# Altium PCB PCB_Control.V03.R00.PcbDoc (part 1 of 7)
Units mm, origin at the board's own origin, x right, y up, seen from the top; angles counter-clockwise.
Board outline 188 x 90 mm, 6 copper layers (Top Layer, GND 1, PWR, Signal L4, GND 2, Bottom Layer), stack 1.548 mm thick; 541 components, 265 nets, 1491 pads, 2159 vias.
Unrouted connection lines stored in the file: 819.
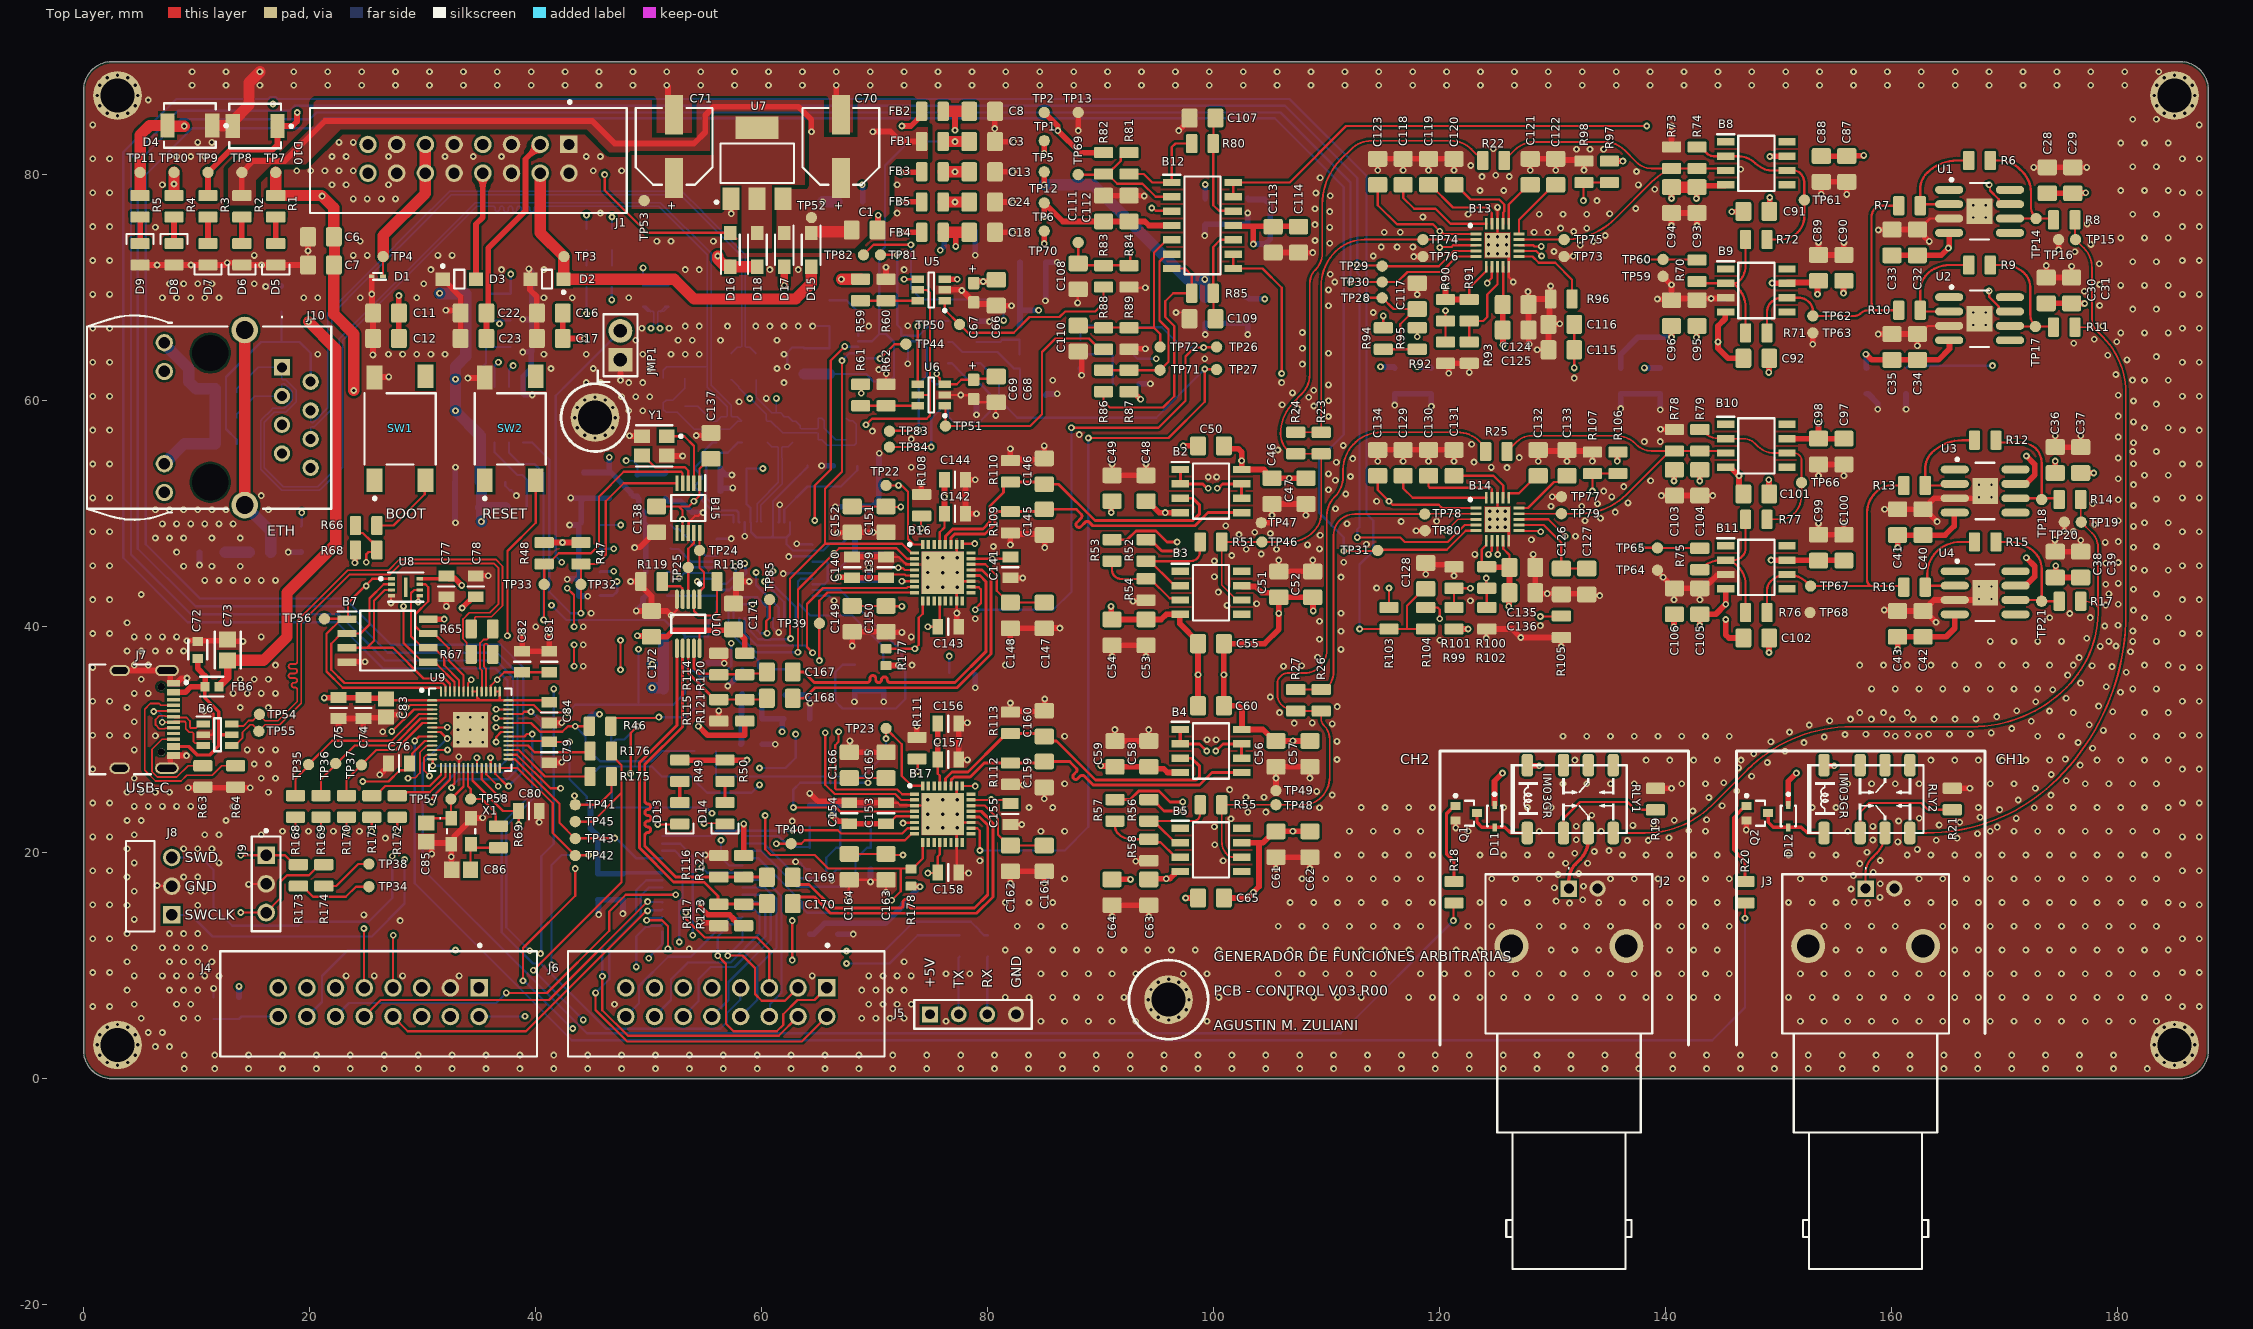
[diagram p0: Top Layer view]
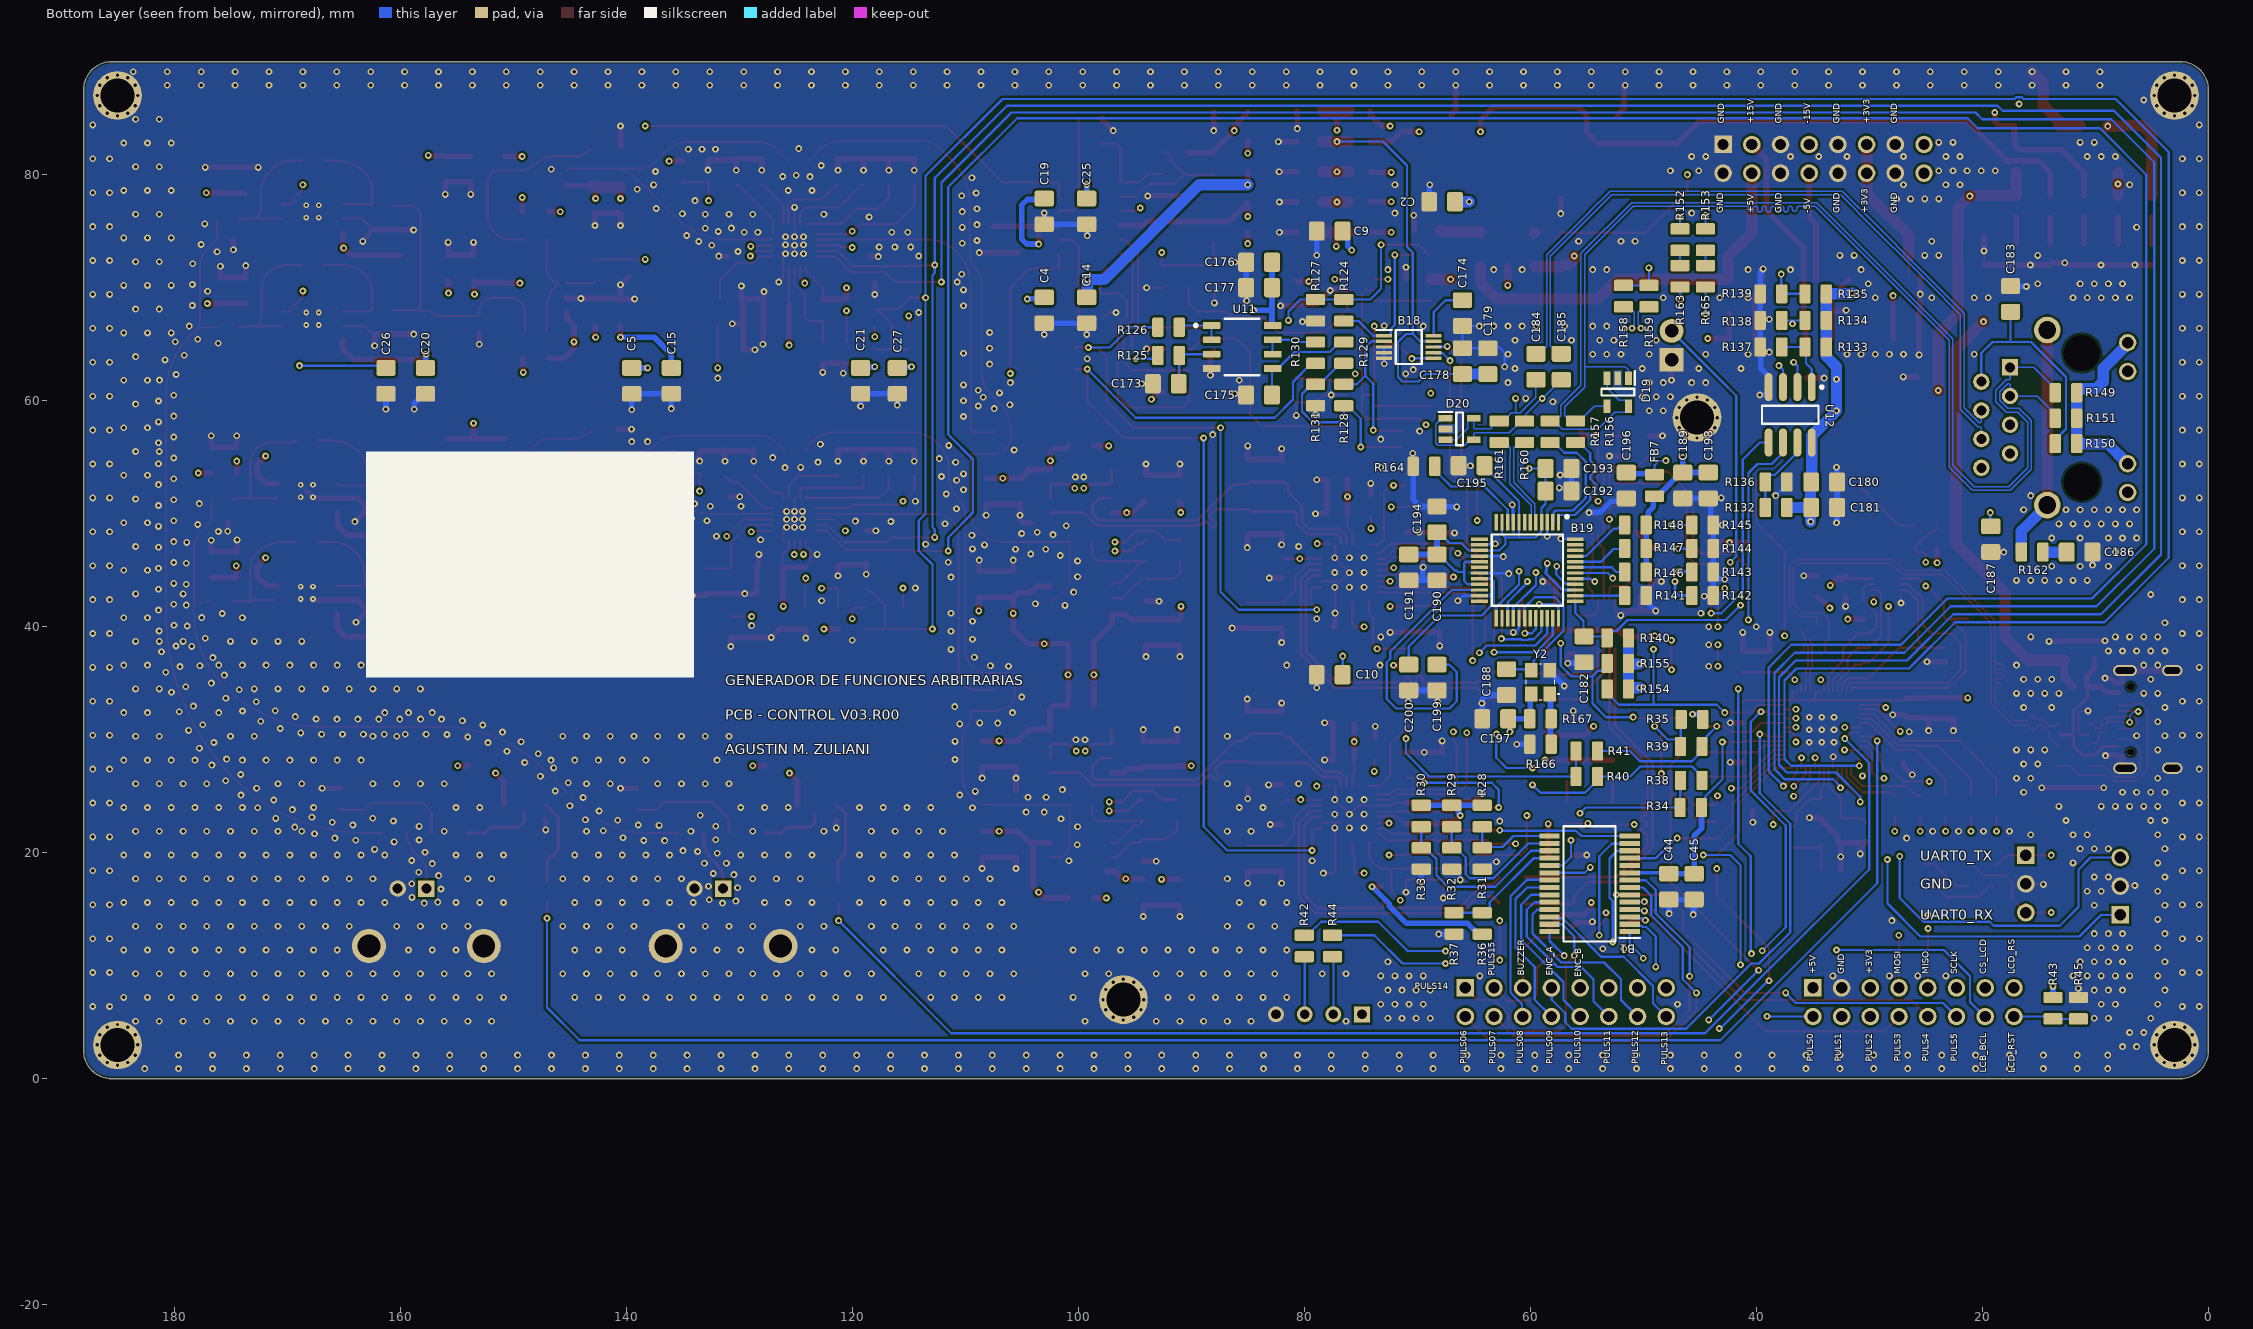
[diagram p1: Bottom Layer view, seen from below]
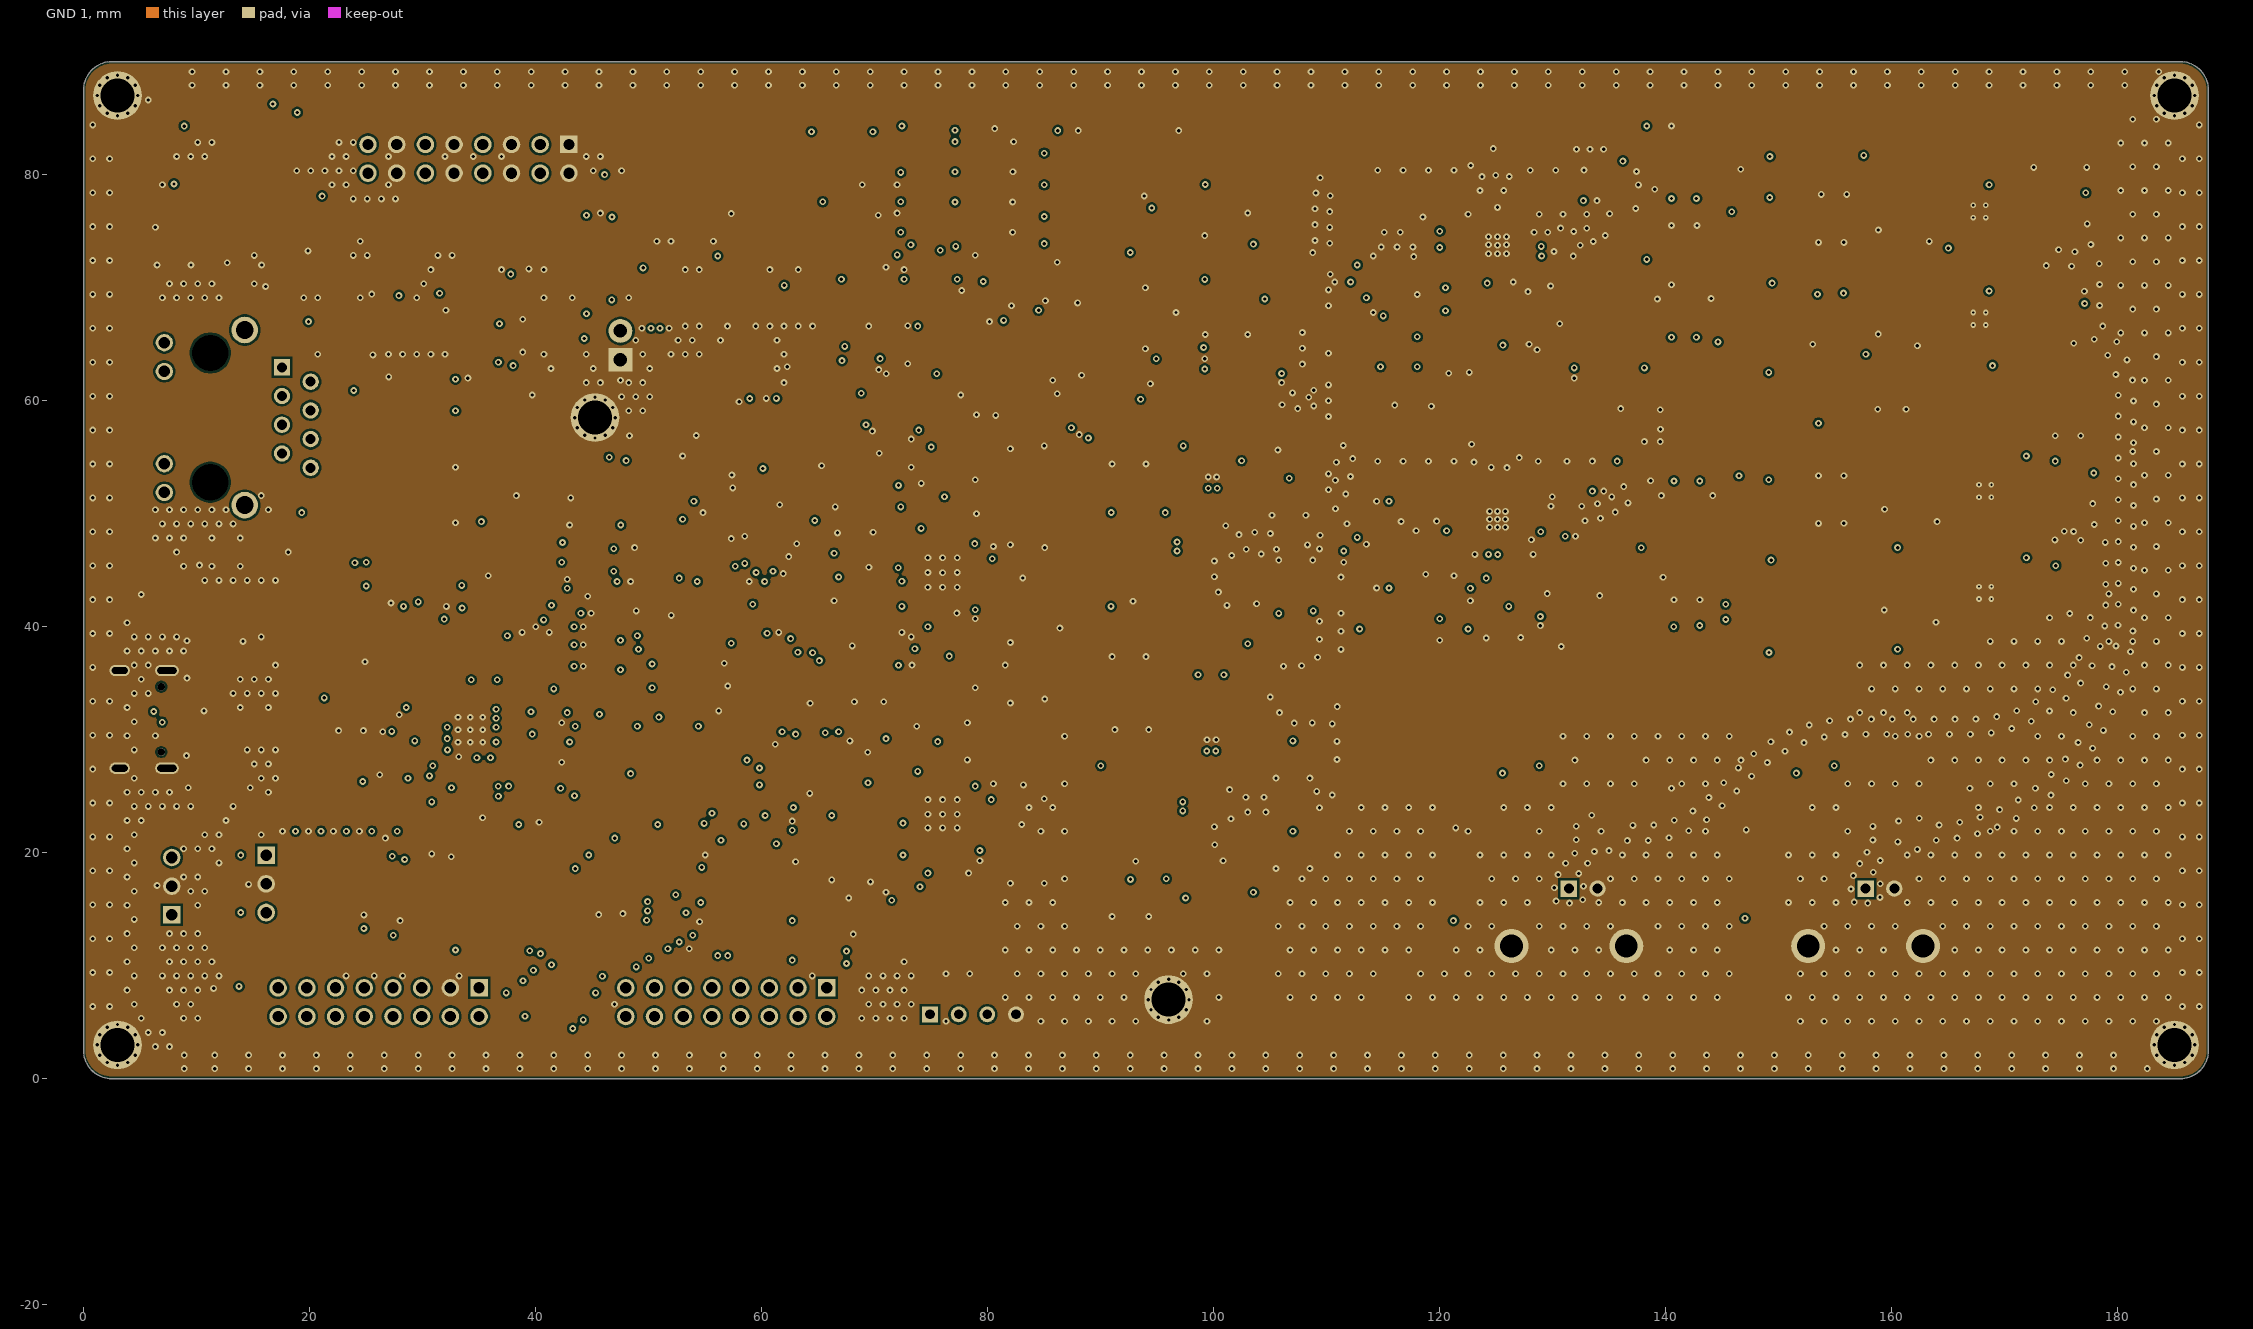
[diagram p2: GND 1]
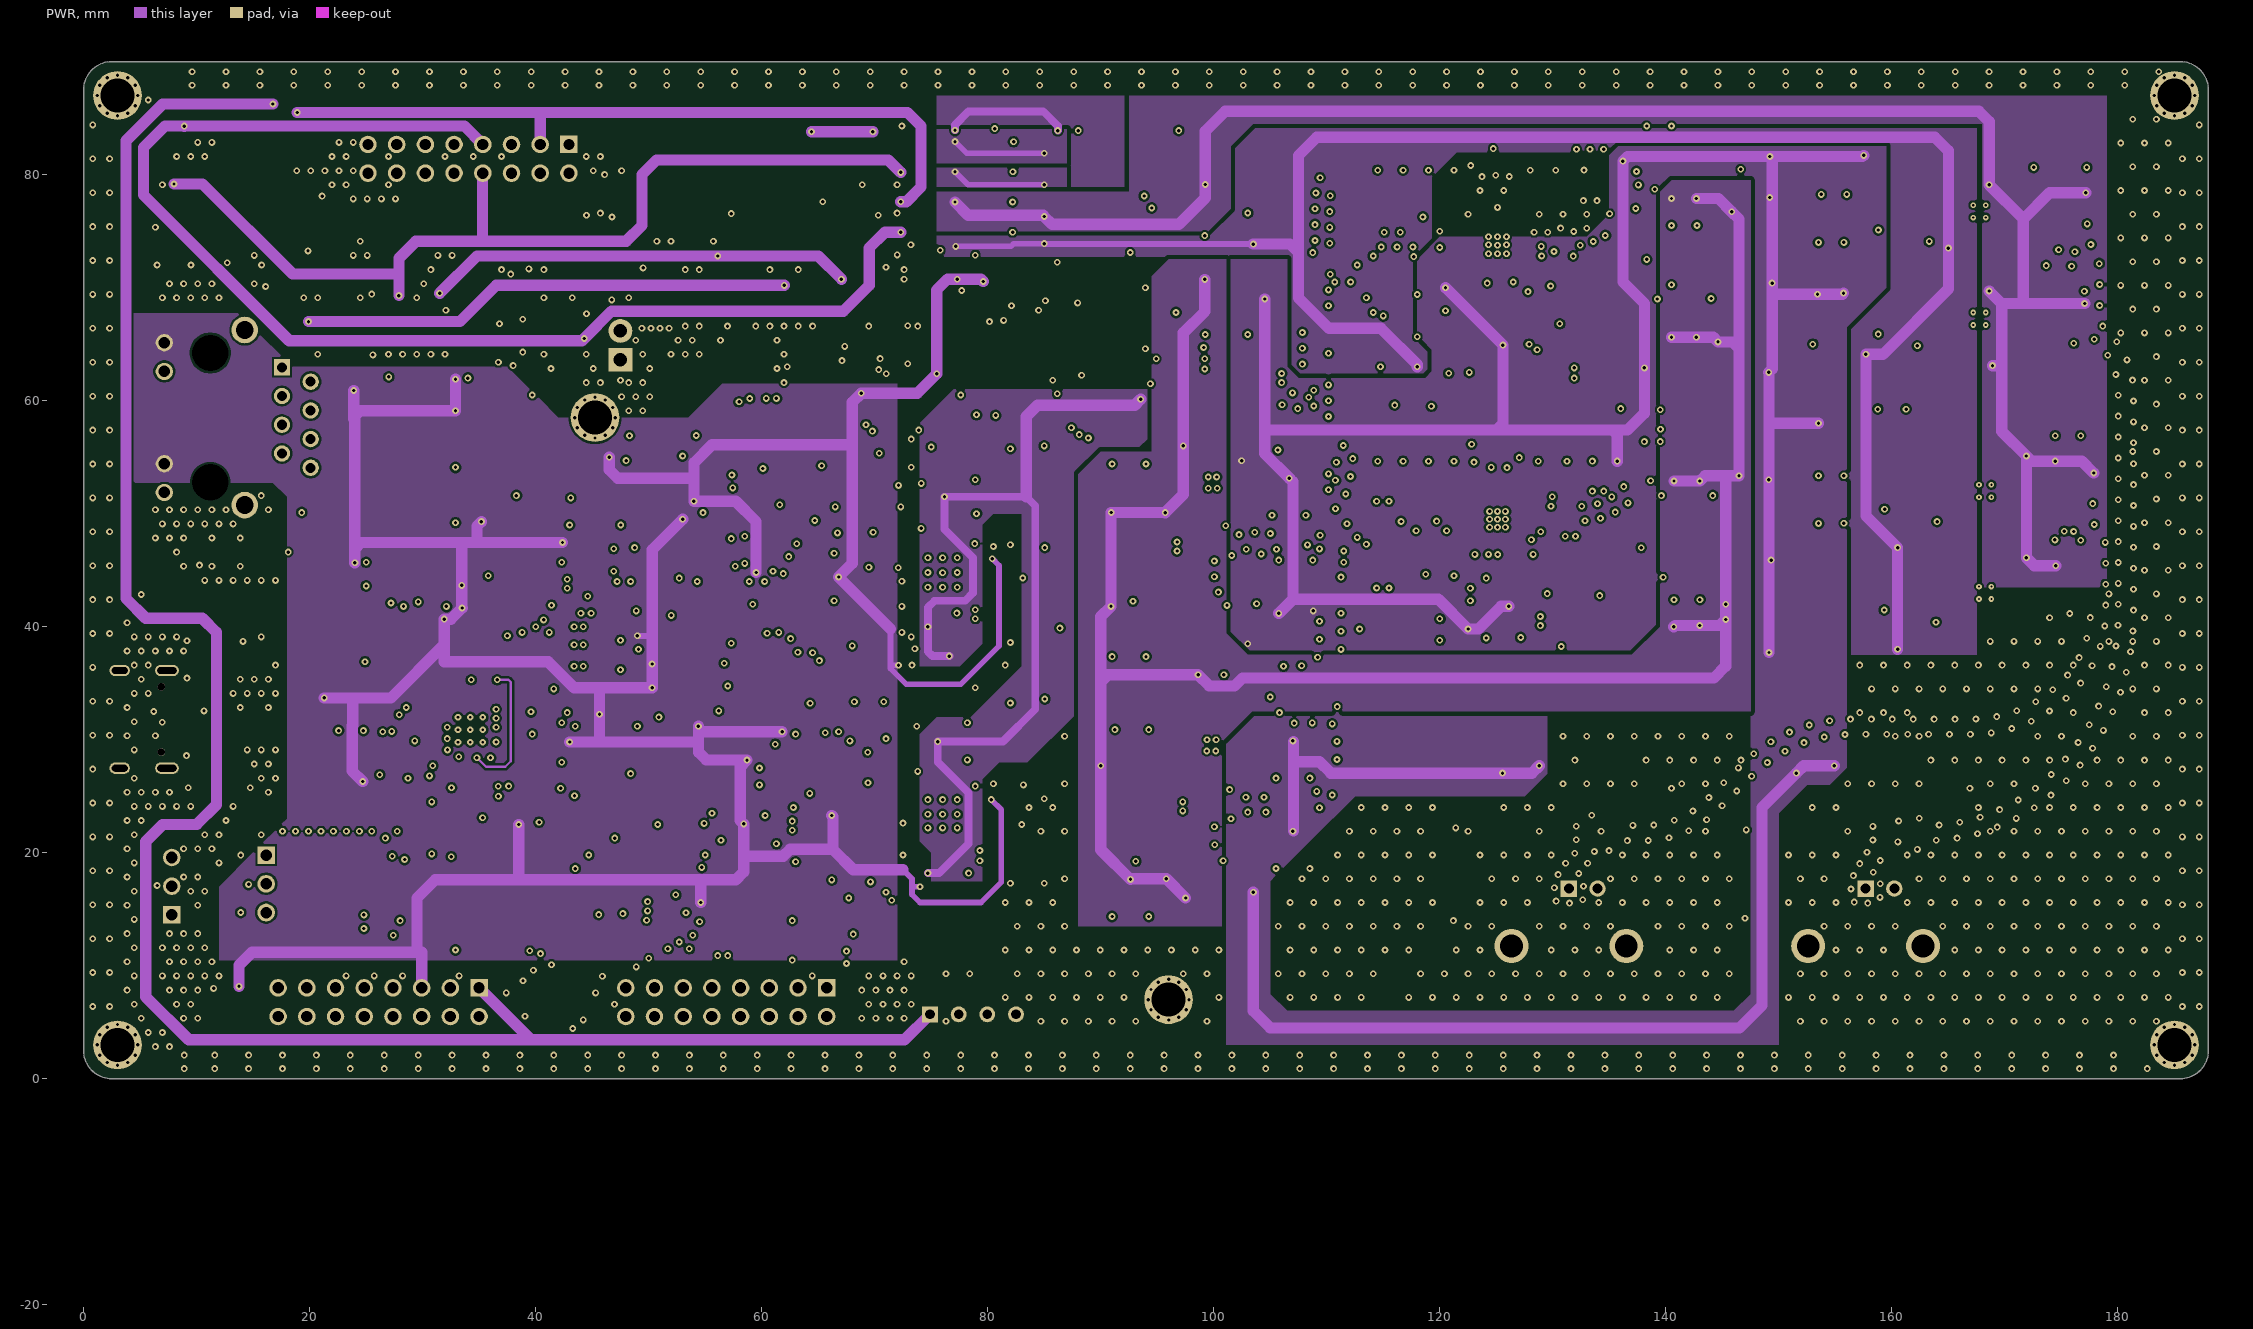
[diagram p3: PWR]
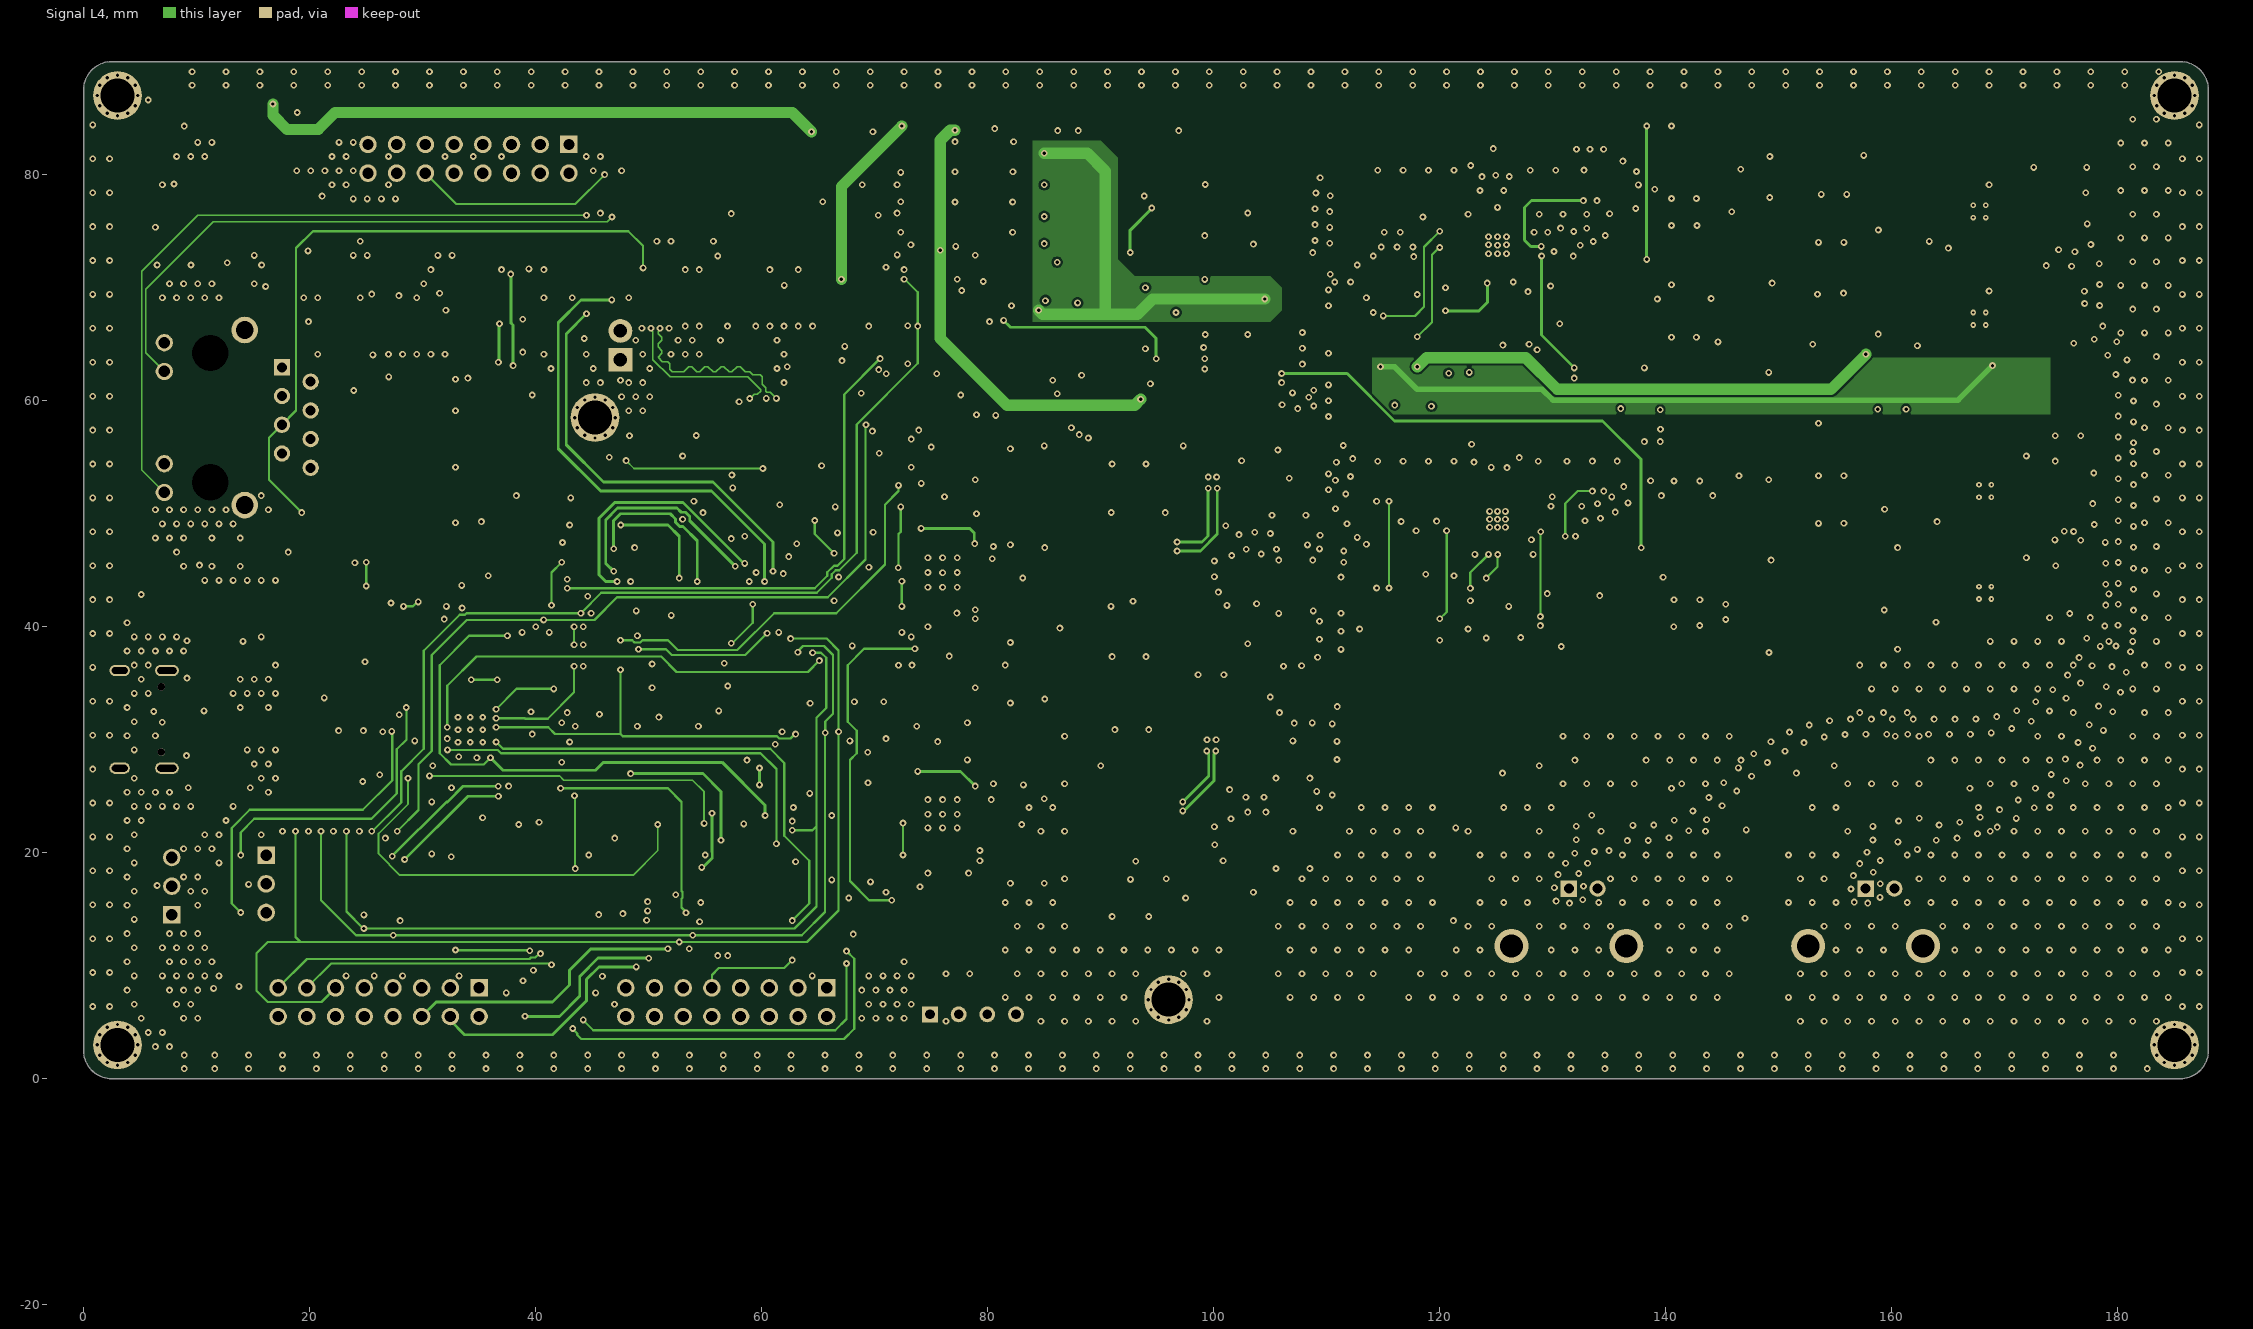
[diagram p4: Signal L4]
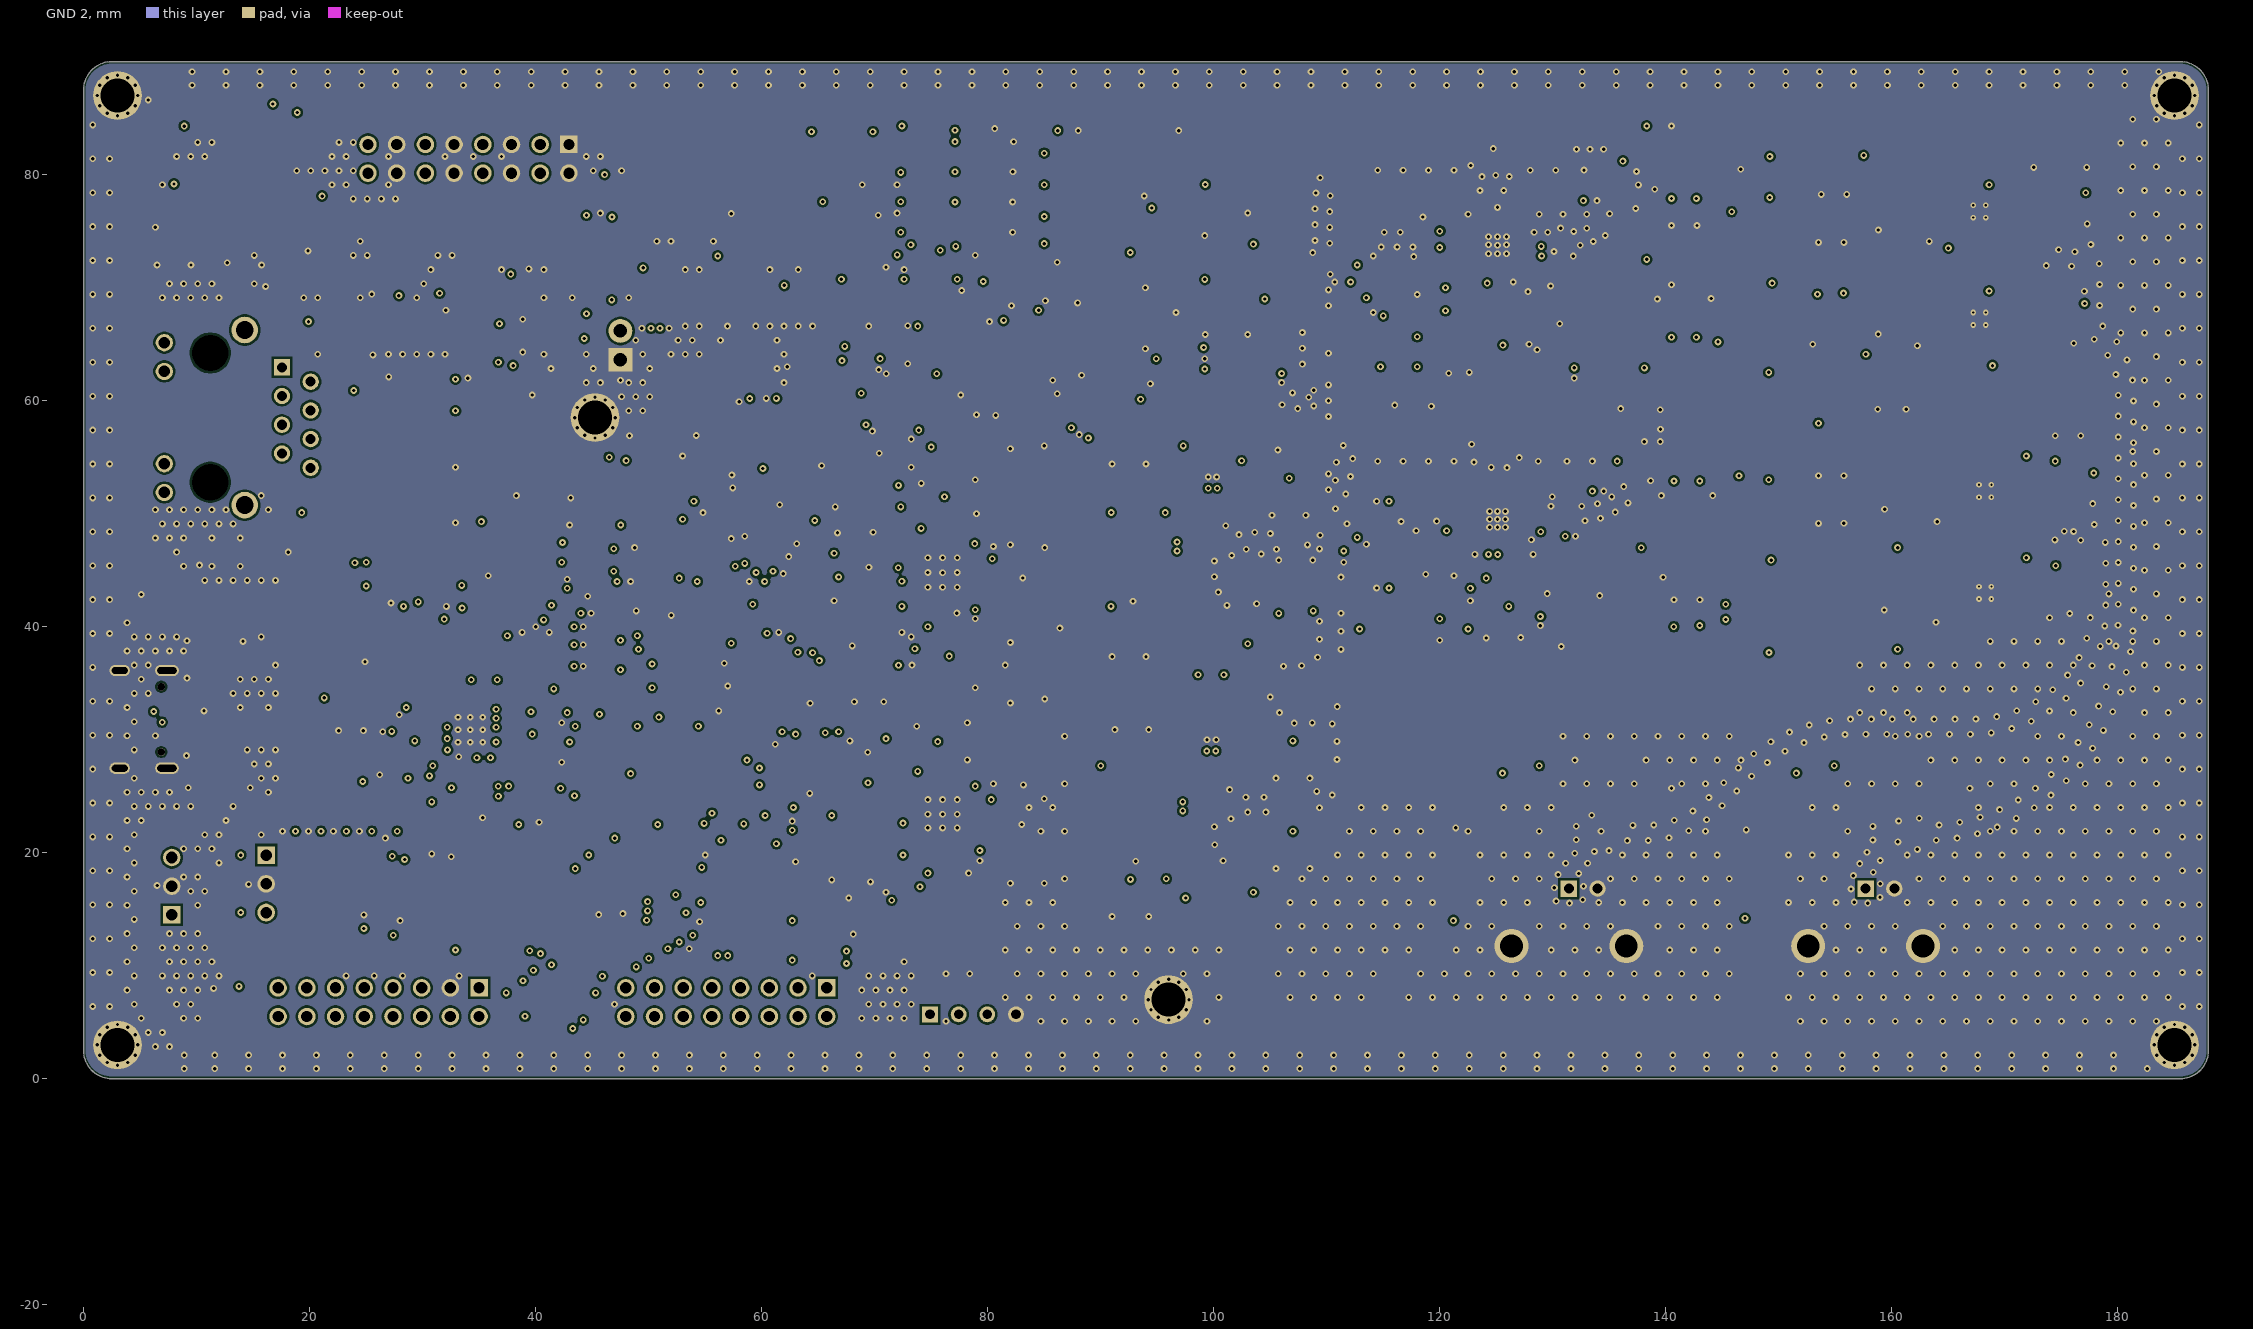
[diagram p5: GND 2]
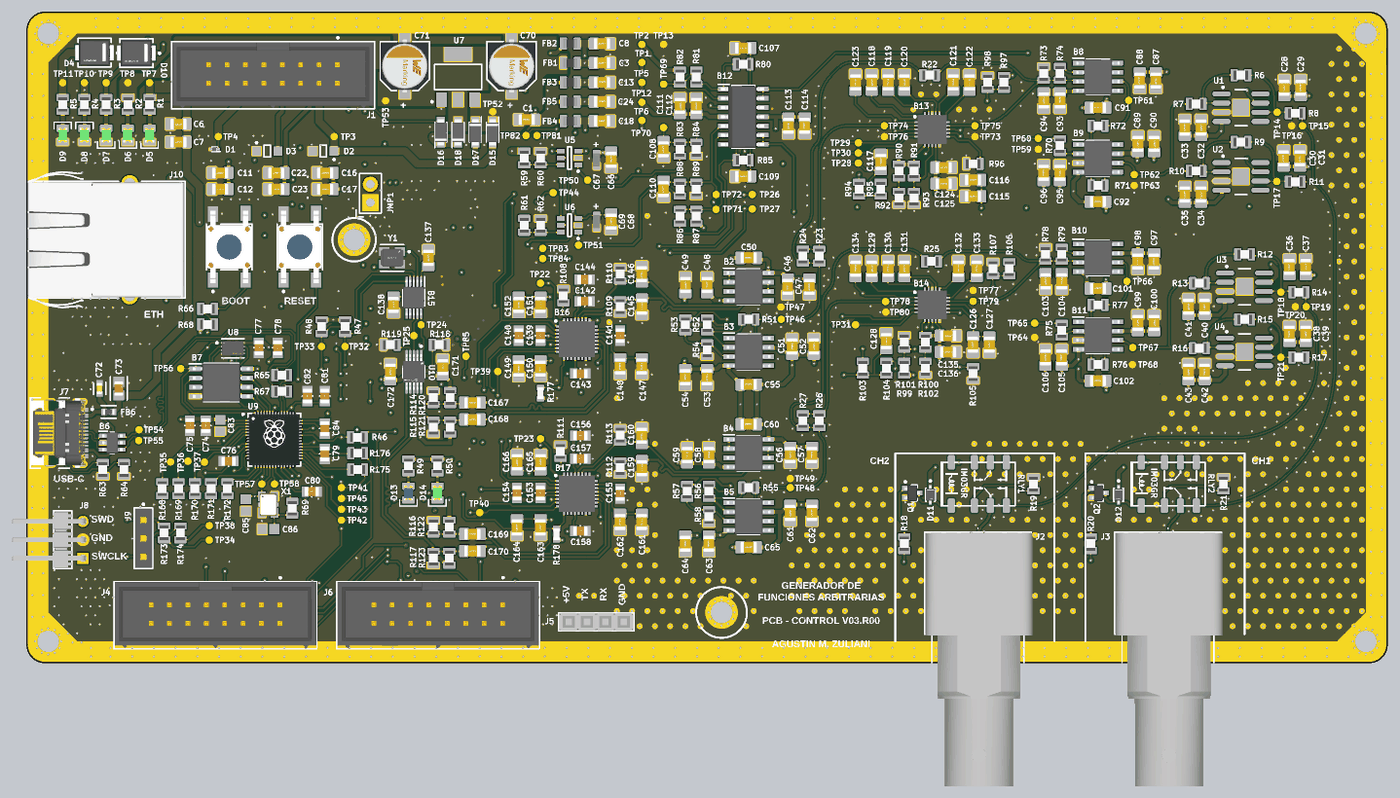
[diagram p11: 3D render of the assembled board from above, using the file's embedded part models]
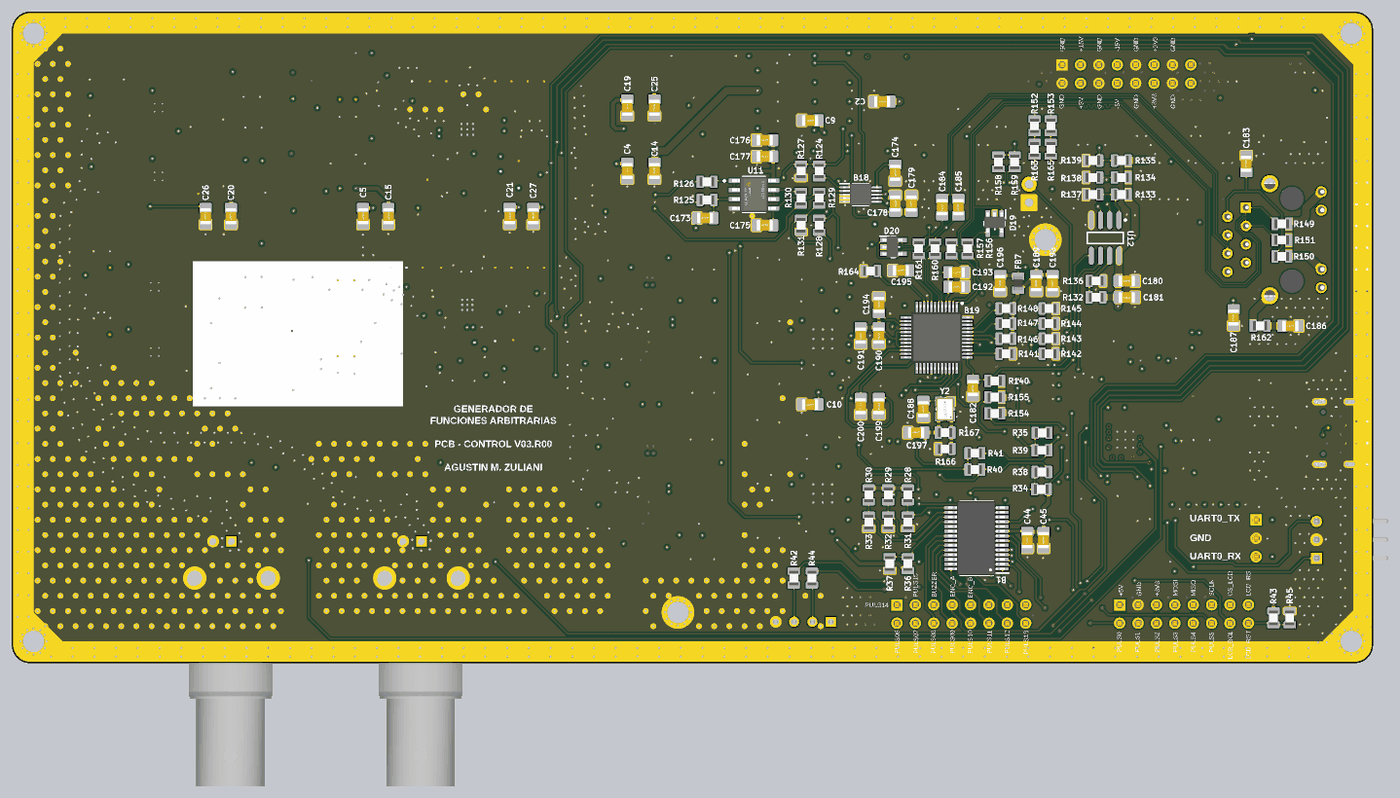
[diagram p12: 3D render of the assembled board from below, using the file's embedded part models]

## Layer stack, top to bottom
Top Solder: solder mask 0.0102, Solder Resist, Dk 3.8
Top Layer: signal copper 0.035
PP1_3313: prepreg 0.0994, PP-006, Dk 4.1
GND 1: signal copper 0.0152
Dielectric 1: core 0.55, FR-4, Dk 4.6
PWR: signal copper 0.0152
PP2_2116: prepreg 0.1164, PP-006, Dk 4.16
Signal L4: signal copper 0.0152
Dielectric 2: core 0.55, FR-4, Dk 4.6
GND 2: signal copper 0.0175
PP3_3313: prepreg 0.0994, PP-006, Dk 4.1
Bottom Layer: signal copper 0.035
Bottom Solder: solder mask 0.0102, Solder Resist, Dk 3.8

## Board outline
0,2.5 0,87.5 cw(c2.5,87.5) 2.5,90 185.5,90 cw(c185.5,87.5) 188,87.5 188,2.5 cw(c185.5,2.5) 185.5,0 2.5,0 cw(c2.5,2.5)

## Design rules (kind name [scope] priority, off if disabled: settings)
BoardOutlineClearance [Not (OnLayer('Top Overlay'))] p1: gap=0.2 ignorepadtopadclearanceinfootprint=FALSE
Clearance "Schematic Clearance Constraint_15" [InNet('+5V')] p1: gap=0.2 ignorepadtopadclearanceinfootprint=TRUE except(0.4: Fill-Fill Fill-Poly Fill-Region Poly-Poly Poly-Region Region-Region)
Clearance "Schematic Clearance Constraint_14" [InNet('+5V_CONN')] p2: gap=0.2 ignorepadtopadclearanceinfootprint=TRUE except(0.4: Fill-Fill Fill-Poly Fill-Region Poly-Poly Poly-Region Region-Region)
Clearance "Schematic Clearance Constraint_13" [InNet('+A3V3')] p3: gap=0.2 ignorepadtopadclearanceinfootprint=TRUE except(0.4: Fill-Fill Fill-Poly Fill-Region Poly-Poly Poly-Region Region-Region)
Clearance "Schematic Clearance Constraint_12" [InNet('-A15V')] p4: gap=0.2 ignorepadtopadclearanceinfootprint=TRUE except(0.4: Fill-Fill Fill-Poly Fill-Region Poly-Poly Poly-Region Region-Region)
Clearance "Schematic Clearance Constraint_11" [InNet('+3V3_CONN')] p5: gap=0.2 ignorepadtopadclearanceinfootprint=TRUE except(0.4: Fill-Fill Fill-Poly Fill-Region Poly-Poly Poly-Region Region-Region)
Clearance "Schematic Clearance Constraint_10" [InNet('GND')] p6: gap=0.2 ignorepadtopadclearanceinfootprint=TRUE except(0.4: Fill-Fill Fill-Poly Fill-Region Poly-Poly Poly-Region Region-Region)
Clearance "Schematic Clearance Constraint_9" [InNet('+3V3')] p7: gap=0.2 ignorepadtopadclearanceinfootprint=TRUE except(0.4: Fill-Fill Fill-Poly Fill-Region Poly-Poly Poly-Region Region-Region)
Clearance "Schematic Clearance Constraint_8" [InNet('+A5V')] p8: gap=0.2 ignorepadtopadclearanceinfootprint=TRUE except(0.4: Fill-Fill Fill-Poly Fill-Region Poly-Poly Poly-Region Region-Region)
Clearance "Schematic Clearance Constraint_7" [InNet('LDO_OUT')] p9: gap=0.2 ignorepadtopadclearanceinfootprint=FALSE
Clearance "Schematic Clearance Constraint_6" [InNet('-15V')] p10: gap=0.2 ignorepadtopadclearanceinfootprint=TRUE except(0.4: Fill-Fill Fill-Poly Fill-Region Poly-Poly Poly-Region Region-Region)
Clearance "Schematic Clearance Constraint_5" [InNet('+15V')] p11: gap=0.2 ignorepadtopadclearanceinfootprint=TRUE except(0.4: Fill-Fill Fill-Poly Fill-Region Poly-Poly Poly-Region Region-Region)
Clearance "Schematic Clearance Constraint_4" [InNet('-5V')] p12: gap=0.2 ignorepadtopadclearanceinfootprint=TRUE except(0.4: Fill-Fill Fill-Poly Fill-Region Poly-Poly Poly-Region Region-Region)
Clearance "Schematic Clearance Constraint_3" [InNet('+A15V')] p13: gap=0.2 ignorepadtopadclearanceinfootprint=TRUE except(0.4: Fill-Fill Fill-Poly Fill-Region Poly-Poly Poly-Region Region-Region)
Clearance "Schematic Clearance Constraint_2" [InNet('-A5V')] p14: gap=0.2 ignorepadtopadclearanceinfootprint=TRUE except(0.4: Fill-Fill Fill-Poly Fill-Region Poly-Poly Poly-Region Region-Region)
Clearance "Schematic Clearance Constraint" [InNet('VBUS')] p15: gap=0.2 ignorepadtopadclearanceinfootprint=FALSE
Clearance [All] p16: gap=0.2 ignorepadtopadclearanceinfootprint=TRUE except(0.15: Arc-SMDPad Track-SMDPad SMDPad-SMDPad)
DiffPairsRouting "Schematic Differential Pairs Routing_2" [InNetClass('USB')] p1: maxlimit=0.2 minlimit=0.127 mostfreqgap=0.127 toplayer_mingap=0.2 toplayer_prefgap=0.2 toplayer_minwidth=0.16 toplayer_maxwidth=0.16 toplayer_prefwidth=0.16 midlayer1_maxgap=0.127 midlayer1_minwidth=0.116 midlayer1_maxwidth=0.116 midlayer1_prefwidth=0.116 midlayer2_maxgap=0.127 midlayer2_minwidth=0.116 midlayer2_maxwidth=0.116 midlayer2_prefwidth=0.116 bottomlayer_maxgap=0.127 bottomlayer_minwidth=0.15 bottomlayer_maxwidth=0.15 bottomlayer_prefwidth=0.15 impedanceprofiledriven=TRUE impedanceprofileid={ED993137-4345-454A-B1F5-5296296163B6} impedanceprofilevalue=90.000000 maxuncoupledlength=12.7
DiffPairsRouting "Schematic Differential Pairs Routing_1" [InNetClass('ETHERNET')] p2: maxlimit=0.325 minlimit=0.127 mostfreqgap=0.325 toplayer_maxgap=0.127 toplayer_prefgap=0.127 toplayer_minwidth=0.13 toplayer_maxwidth=0.13 toplayer_prefwidth=0.13 midlayer2_mingap=0.325 midlayer2_minwidth=0.13 midlayer2_maxwidth=0.13 midlayer2_prefwidth=0.13 bottomlayer_mingap=0.2 bottomlayer_maxgap=0.2 bottomlayer_prefgap=0.2 bottomlayer_minwidth=0.13 bottomlayer_maxwidth=0.13 bottomlayer_prefwidth=0.13 impedanceprofiledriven=TRUE impedanceprofileid={A3381CAB-FDE6-433F-B704-C07F16A45E2D} impedanceprofilevalue=100.000000 maxuncoupledlength=12.7
DiffPairsRouting DiffPairsRouting_Ethernet [InDifferentialPair('RD') and InDifferentialPair('RX') and InDifferentialPair('RX_TF') and InDifferentialPair('TX') and InDifferentialPair('TX_TF')] p3: maxlimit=0.325 minlimit=0.127 mostfreqgap=0.325 toplayer_maxgap=0.127 toplayer_prefgap=0.127 toplayer_minwidth=0.13 toplayer_maxwidth=0.13 toplayer_prefwidth=0.13 midlayer2_mingap=0.325 midlayer2_minwidth=0.13 midlayer2_maxwidth=0.13 midlayer2_prefwidth=0.13 bottomlayer_mingap=0.2 bottomlayer_maxgap=0.2 bottomlayer_prefgap=0.2 bottomlayer_minwidth=0.13 bottomlayer_maxwidth=0.13 bottomlayer_prefwidth=0.13 impedanceprofiledriven=TRUE impedanceprofileid={A3381CAB-FDE6-433F-B704-C07F16A45E2D} impedanceprofilevalue=100.000000 maxuncoupledlength=12.7
DiffPairsRouting [InDifferentialPair('USB') and InDifferentialPair('MCU_USB') and InDifferentialPair('USB0')] p4: maxlimit=0.2 minlimit=0.127 mostfreqgap=0.127 toplayer_mingap=0.2 toplayer_prefgap=0.2 toplayer_minwidth=0.16 toplayer_maxwidth=0.16 toplayer_prefwidth=0.16 midlayer1_maxgap=0.127 midlayer1_minwidth=0.116 midlayer1_maxwidth=0.116 midlayer1_prefwidth=0.116 midlayer2_maxgap=0.127 midlayer2_minwidth=0.116 midlayer2_maxwidth=0.116 midlayer2_prefwidth=0.116 bottomlayer_maxgap=0.127 bottomlayer_minwidth=0.15 bottomlayer_maxwidth=0.15 bottomlayer_prefwidth=0.15 impedanceprofiledriven=TRUE impedanceprofileid={ED993137-4345-454A-B1F5-5296296163B6} impedanceprofilevalue=90.000000 maxuncoupledlength=12.7
HoleSize [All] p1: absolutevalues=TRUE maxlimit=5 minlimit=0.025 maxpercent=80.000 minpercent=20.000
HoleToHoleClearance [All] p1: gap=0.15 allowstackedmicrovias=TRUE
MatchedLengths "Schematic Matched Net Lengths_4" [InDifferentialPairClass('USB')] p1: tolerance=0.25 checknetsindiffpair=TRUE checkdiffpairvsdiffpair=FALSE checkxsignals=FALSE checkothers=FALSE
MatchedLengths "Schematic Matched Net Lengths_3" [InNetClass('CLOCK_SY55857')] p2: tolerance=0.25 checknetsindiffpair=TRUE checkdiffpairvsdiffpair=FALSE checkxsignals=FALSE checkothers=FALSE
MatchedLengths "Schematic Matched Net Lengths_2" [InNetClass('DDS_IOUT')] p3: tolerance=0.25 checknetsindiffpair=TRUE checkdiffpairvsdiffpair=FALSE checkxsignals=FALSE checkothers=FALSE
MatchedLengths "Schematic Matched Net Lengths" [InNetClass('AD9102_CLK')] p4: tolerance=0.25 checknetsindiffpair=TRUE checkdiffpairvsdiffpair=FALSE checkxsignals=FALSE checkothers=FALSE
MatchedLengths "Schematic Matched Net Lengths_1" [InNetClass('ETHERNET')] p5: tolerance=1 checknetsindiffpair=TRUE checkdiffpairvsdiffpair=FALSE checkxsignals=FALSE checkothers=FALSE
MatchedLengths [InDifferentialPair('TX_TF')] p6: tolerance=1 checknetsindiffpair=TRUE checkdiffpairvsdiffpair=FALSE checkxsignals=FALSE checkothers=FALSE
MinimumAnnularRing [All] p1: minimumring=0.15
MinimumSolderMaskSliver [All] p1 off: minsoldermaskwidth=0.1
PlaneConnect [All] p1: planeconnectstyle=Direct reliefexpansion=0.508 reliefentries=4 reliefconductorwidth=0.254 reliefairgap=0.254
PolygonConnect "Schematic Polygon Connect Style_1" [InNetClass('Power')] p1: connectstyle=Direct reliefconductorwidth=0.254 reliefentries=4 polygonreliefangle="90 Angle" airgapwidth=0.254
PolygonConnect [All] p2: connectstyle=Direct reliefconductorwidth=0.254 reliefentries=4 polygonreliefangle="90 Angle" airgapwidth=0.254
RoomDefinition Ethernet [InComponentClass('Ethernet')] p1: confinementstyle=ConfineIn formatcopy=TRUE lockcomponents=FALSE outline -1.4,28.1 72.6,28.1 72.6,77.1 -1.4,77.1
RoomDefinition Atenuador_Digital_Pasos1 [InComponentClass('Atenuador_Digital_Pasos1')] p2: confinementstyle=ConfineIn formatcopy=TRUE lockcomponents=FALSE outline 113,62.1 136.5,62.1 136.5,82.8 113,82.8
RoomDefinition Offset1 [InComponentClass('Offset1')] p3: confinementstyle=ConfineIn formatcopy=TRUE lockcomponents=FALSE outline 138.9,62.2 157.5,62.2 157.5,84.1 138.9,84.1
RoomDefinition Amplificador1 [InComponentClass('Amplificador1')] p4: confinementstyle=ConfineIn formatcopy=TRUE lockcomponents=FALSE outline 158.5,62.2 177.5,62.2 177.5,82.8 158.5,82.8
RoomDefinition Atenuador_Digital_Pasos2 [InComponentClass('Atenuador_Digital_Pasos2')] p5: confinementstyle=ConfineIn formatcopy=TRUE lockcomponents=FALSE outline 113,37.8 137.3,37.8 137.3,57.1 113,57.1
RoomDefinition Offset2 [InComponentClass('Offset2')] p6: confinementstyle=ConfineIn formatcopy=TRUE lockcomponents=FALSE outline 138.4,37.5 157.3,37.5 157.3,59.1 138.4,59.1
RoomDefinition Amplificador2 [InComponentClass('Amplificador2')] p7: confinementstyle=ConfineIn formatcopy=TRUE lockcomponents=FALSE outline 159,37.7 178.2,37.7 178.2,58 159,58
RoomDefinition "Referencia Tension/Ajuste Fino Amplitud - DDS" [InComponentClass('Referencia Tension/Ajuste Fino Amplitud - DDS')] p8: confinementstyle=ConfineIn formatcopy=TRUE lockcomponents=FALSE outline 62.2,55.1 94.8,55.1 94.8,73.8 62.2,73.8
RoomDefinition RELOJ_SI5351 [InComponentClass('RELOJ_SI5351')] p9: confinementstyle=ConfineIn formatcopy=TRUE lockcomponents=FALSE outline 47.6,46.1 57.6,46.1 57.6,59.1 47.6,59.1
RoomDefinition "Memoria EEPROM" [InComponentClass('Memoria EEPROM')] p10: confinementstyle=ConfineIn formatcopy=TRUE lockcomponents=FALSE outline 31.4,49 40.9,49 40.9,71 31.4,71
RoomDefinition DDS1 [InComponentClass('DDS1')] p11: confinementstyle=ConfineIn formatcopy=TRUE lockcomponents=FALSE outline 66.5,35.1 86.5,35.1 86.5,56.3 66.5,56.3
RoomDefinition SALIDA_BNC [InComponentClass('SALIDA_BNC')] p12: confinementstyle=ConfineIn formatcopy=TRUE lockcomponents=FALSE outline 119.7,-18.2 166.9,-18.2 166.9,29.1 119.7,29.1
RoomDefinition "MICROCONTROLADOR RP2040" [InComponentClass('MICROCONTROLADOR RP2040')] p13: confinementstyle=ConfineIn formatcopy=TRUE lockcomponents=FALSE outline -3.4,12.1 71.6,12.1 71.6,88.1 -3.4,88.1
RoomDefinition DDS2 [InComponentClass('DDS2')] p14: confinementstyle=ConfineIn formatcopy=TRUE lockcomponents=FALSE outline 66.2,15.6 86.5,15.6 86.5,34 66.2,34
RoomDefinition DAC_OFFSET_CANAL2 [InComponentClass('DAC_OFFSET_CANAL2')] p15: confinementstyle=ConfineIn formatcopy=TRUE lockcomponents=FALSE outline 66.6,56.1 82.6,56.1 82.6,64.1 66.6,64.1
RoomDefinition DAC_OFFSET_CANAL1 [InComponentClass('DAC_OFFSET_CANAL1')] p16: confinementstyle=ConfineIn formatcopy=TRUE lockcomponents=FALSE outline 67.1,65.15 82.35,65.15 82.35,72.65 67.1,72.65
RoomDefinition DAC_BIPOLAR_CH1-CH2 [InComponentClass('DAC_BIPOLAR_CH1-CH2')] p17: confinementstyle=ConfineIn formatcopy=TRUE lockcomponents=FALSE outline 85.6,59.1 109.6,59.1 109.6,87.1 85.6,87.1
RoomDefinition Conversor_Diff_A_Simple2 [InComponentClass('Conversor_Diff_A_Simple2')] p18: confinementstyle=ConfineIn formatcopy=TRUE lockcomponents=FALSE outline 88.6,13.1 110.6,13.1 110.6,35.1 88.6,35.1
RoomDefinition Conversor_Diff_A_Simple1 [InComponentClass('Conversor_Diff_A_Simple1')] p19: confinementstyle=ConfineIn formatcopy=TRUE lockcomponents=FALSE outline 88.6,32.1 110.6,32.1 110.6,58.1 88.6,58.1
RoomDefinition CONVERSOR_CMOS_A_LVPECL [InComponentClass('CONVERSOR_CMOS_A_LVPECL')] p20: confinementstyle=ConfineIn formatcopy=TRUE lockcomponents=FALSE outline 48.1,12.3 64.2,12.3 64.2,45.5 48.1,45.5
RoomDefinition ConexionesPanelFrontal/Perifericos [InComponentClass('ConexionesPanelFrontal/Perifericos')] p21: confinementstyle=ConfineIn formatcopy=TRUE lockcomponents=FALSE outline 11.6,1.1 84.6,1.1 84.6,34.1 11.6,34.1
RoutingVias "Schematic Routing Via Style" [InNetClass('OUT_BNC')] p1: holewidth=0.3 width=0.6 viastyle="Through Hole" minholewidth=0.3 minwidth=0.6 maxholewidth=0.711 maxwidth=1.27
RoutingVias "Schematic Routing Via Style_1" [InNetClass('Power')] p2: holewidth=0.711 width=1.27 viastyle="Through Hole" minholewidth=0.3 minwidth=0.6 maxholewidth=0.3 maxwidth=0.6
RoutingVias [All] p3: holewidth=0.711 width=1.27 viastyle="Through Hole" minholewidth=0.3 minwidth=0.6 maxholewidth=0.3 maxwidth=0.6
SilkToSilkClearance [All] p1: silktosilkclearance=0.1
SilkToSolderMaskClearance [IsPad] p1 off: minsilkscreentomaskgap=0.15 clearancetoexposedcopper=TRUE
SolderMaskExpansion SolderMaskExpansion_1 [IsVia] p1: expansion=0.102 istentingtop=TRUE
SolderMaskExpansion [All] p2: expansion=0.102 istentingtop=FALSE
SupplyNets "Schematic Supply Nets_16" [InNet('EARTH')] p1: voltage=0.000
SupplyNets "Schematic Supply Nets_11" [InNet('AVDD')] p2: voltage=0.000
SupplyNets "Schematic Supply Nets_15" [InNet('-15V')] p3: voltage=0.000
SupplyNets "Schematic Supply Nets_14" [InNet('VBUS')] p4: voltage=0.000
SupplyNets "Schematic Supply Nets_13" [InNet('+A3V3')] p5: voltage=0.000
SupplyNets "Schematic Supply Nets_12" [InNet('+5V')] p6: voltage=0.000
SupplyNets "Schematic Supply Nets_10" [InNet('+15V')] p7: voltage=0.000
SupplyNets "Schematic Supply Nets_9" [InNet('+3V3_CONN')] p8: voltage=0.000
SupplyNets "Schematic Supply Nets_8" [InNet('+1V1')] p9: voltage=0.000
SupplyNets "Schematic Supply Nets_7" [InNet('+3V3')] p10: voltage=0.000
SupplyNets "Schematic Supply Nets_6" [InNet('-A5V')] p11: voltage=0.000
SupplyNets "Schematic Supply Nets_5" [InNet('+A5V')] p12: voltage=0.000
SupplyNets "Schematic Supply Nets_4" [InNet('+A15V')] p13: voltage=0.000
SupplyNets "Schematic Supply Nets_3" [InNet('+5V_CONN')] p14: voltage=0.000
SupplyNets "Schematic Supply Nets_2" [InNet('-5V')] p15: voltage=0.000
SupplyNets "Schematic Supply Nets_1" [InNet('GND')] p16: voltage=0.000
SupplyNets "Schematic Supply Nets" [InNet('-A15V')] p17: voltage=0.000
UnRoutedNet UnRouted_PWR_GND [InNetClass('Power')] p1: checkbadconnections=TRUE
UnRoutedNet [not InNetClass('Power')] p2: checkbadconnections=TRUE
ViasUnderSMD [All] p1: allowed=FALSE
Width "Schematic Width Constraint" [InNetClass('OUT_BNC')] p1: maxlimit=0.254 minlimit=0.147 preferedwidth=0.254 toplayer_minwidth=0.15 toplayer_maxwidth=0.15 toplayer_prefwidth=0.15 midlayer1_maxwidth=0.147 midlayer1_prefwidth=0.147 midlayer2_maxwidth=0.147 midlayer2_prefwidth=0.147 bottomlayer_minwidth=0.169 bottomlayer_maxwidth=0.169 bottomlayer_prefwidth=0.169 impedanceprofiledriven=TRUE impedanceprofileid={E685F6A5-5F57-4B5E-A957-9F3A7105FB40} impedanceprofilevalue=50.000000 minimp=50.000000 maximp=50.000000 favimp=50.000000
Width "Schematic Width Constraint_1" [InNetClass('Power')] p2: maxlimit=1 minlimit=0.2 preferedwidth=0.5
Width [All] p3: maxlimit=3 minlimit=0.152 preferedwidth=0.254 toplayer_prefwidth=0.2 midlayer3_minwidth=0.254 midlayer3_maxwidth=0.254 midlayer4_minwidth=0.254 midlayer4_maxwidth=0.254 bottomlayer_prefwidth=0.2 minimp=50.000000 maximp=50.000000 favimp=50.000000
22 further rules are at their usual default settings.

## Classes and differential pairs
net class OUT_BNC: AMPL_VOUT_Amplificador1 AMPL_VOUT_Amplificador2
net class USB: MCU_USB_N MCU_USB_P USB0_N USB0_P USB_N USB_P
differential pair class CLOCK_SY55857: SY55857_Q0 SY55857_Q1
net class CLOCK_SY55857: SY55857_Q0_N SY55857_Q0_P SY55857_Q1_N SY55857_Q1_P
differential pair class DDS_IOUT: DDS_IOUT_DDS1 DDS_IOUT_DDS2
differential pair class AD9102_CLK: AD9102_CLK_DDS1 AD9102_CLK_DDS2
net class DDS_IOUT: DDS_IOUT_DDS1_N DDS_IOUT_DDS1_P DDS_IOUT_DDS2_N DDS_IOUT_DDS2_P
net class AD9102_CLK: AD9102_CLK_DDS1_N AD9102_CLK_DDS1_P AD9102_CLK_DDS2_N AD9102_CLK_DDS2_P
net class ETHERNET: RD_N RD_P RX_N RX_P RX_TF_N RX_TF_P TX_N TX_P TX_TF_N TX_TF_P
differential pair class Ethernet: RD RX RX_TF TX TX_TF
differential pair class USB: MCU_USB USB USB0
net class Power: +3V3 +3V3_CONN +5V +5V_CONN +15V +A3V3 +A5V +A15V -5V -15V -A5V -A15V GND LDO_OUT VBUS
component class Ethernet: B19 C182 C183 C184 C185 C186 C187 C188 C189 C190 C191 C192 C193 C194 C195 C196 C197 C198 C199 C200 D19 D20 FB7 J10 JMP1 R140 R141 R142 R143 R144 R145 R146 R147 R148 R149 R150 R151 R152 R153 R154 R155 R156 R157 R158 R159 R160 R161 R162 R163 R164 R165 R166 R167 Y2
component class ConexionesPanelFrontal/Perifericos: B1 C44 C45 J4 J5 J6 R28 R29 R30 R31 R32 R33 R34 R35 R36 R37
component class "Referencia Tension/Ajuste Fino Amplitud - DDS": B18 C173 C174 C175 C176 C177 C178 C179 R124 R125 R126 R127 R128 R129 R130 R131 TP81 TP82 TP83 TP84 U11
component class DAC_BIPOLAR_CH1-CH2: B12 C107 C108 C109 C110 C111 C112 C113 C114 R80 R81 R82 R83 R84 R85 R86 R87 R88 R89 TP69 TP70 TP71 TP72
channel class Sintetizador-AD9102.V03.R00: DDS1 DDS2
channel class PE4312.V03.R00: Atenuador_Digital_Pasos1 Atenuador_Digital_Pasos2
channel class Offset.V03.R00: Offset1 Offset2
channel class MCP4725.V03.R00: DAC_OFFSET_CANAL1 DAC_OFFSET_CANAL2
channel class DifferentialToSingleOutput.V03.R00: Conversor_Diff_A_Simple1 Conversor_Diff_A_Simple2
channel class Canal-DDS.V03.R00: DDS_CANAL1 DDS_CANAL2
channel class Amplificador.V03.R00: Amplificador1 Amplificador2
net class MCU_GPIO[0..29]: MCU_GPIO0 MCU_GPIO1 MCU_GPIO2 MCU_GPIO3 MCU_GPIO4 MCU_GPIO5 MCU_GPIO6 MCU_GPIO7 MCU_GPIO8 MCU_GPIO9 MCU_GPIO10 MCU_GPIO11 MCU_GPIO12 MCU_GPIO13 MCU_GPIO14 MCU_GPIO15 MCU_GPIO16 MCU_GPIO17 MCU_GPIO18 MCU_GPIO19 MCU_GPIO20 MCU_GPIO21 MCU_GPIO22 MCU_GPIO23 MCU_GPIO24 MCU_GPIO25 MCU_GPIO26 MCU_GPIO27 MCU_GPIO28 MCU_GPIO29
component class SALIDA_BNC: D11 D12 J2 J3 Q1 Q2 R18 R19 R20 R21 RLY1 RLY2
component class RELOJ_SI5351: B15 C137 C138 Y1
component class Offset2: B10 B11 C97 C98 C99 C100 C101 C102 C103 C104 C105 C106 R75 R76 R77 R78 R79 TP64 TP65 TP66 TP67 TP68
component class Offset1: B8 B9 C87 C88 C89 C90 C91 C92 C93 C94 C95 C96 R70 R71 R72 R73 R74 TP59 TP60 TP61 TP62 TP63
component class "Alimentacion y Filtro": C1 C2 C3 C4 C5 C6 C7 C8 C9 C10 C11 C12 C13 C14 C15 C16 C17 C18 C19 C20 C21 C22 C23 C24 C25 C26 C27 D1 D2 D3 D4 D5 D6 D7 D8 D9 D10 FB1 FB2 FB3 FB4 FB5 J1 R1 R2 R3 R4 R5 TP1 TP2 TP3 TP4 TP5 TP6 TP7 TP8 TP9 TP10 TP11 TP12 TP13
component class "Memoria EEPROM": C180 C181 R132 R133 R134 R135 R136 R137 R138 R139 U12
component class DDS_CANAL2: R25 R26 R27 TP23
component class DDS_CANAL1: R22 R23 R24 TP22
component class DDS2: B17 C153 C154 C155 C156 C157 C158 C159 C160 C161 C162 C163 C164 C165 C166 R111 R112 R113 R178
component class DDS1: B16 C139 C140 C141 C142 C143 C144 C145 C146 C147 C148 C149 C150 C151 C152 R108 R109 R110 R177
component class DAC_OFFSET_CANAL2: C68 C69 R61 R62 TP51 U6
component class DAC_OFFSET_CANAL1: C66 C67 R59 R60 TP50 U5
component class Conversor_Diff_A_Simple2: B4 B5 C56 C57 C58 C59 C60 C61 C62 C63 C64 C65 R55 R56 R57 R58 TP48 TP49
component class Conversor_Diff_A_Simple1: B2 B3 C46 C47 C48 C49 C50 C51 C52 C53 C54 C55 R51 R52 R53 R54 TP46 TP47
component class CONVERSOR_CMOS_A_LVPECL: C167 C168 C169 C170 C171 C172 R114 R115 R116 R117 R118 R119 R120 R121 R122 R123 U10
component class "MICROCONTROLADOR RP2040": B6 B7 C70 C71 C72 C73 C74 C75 C76 C77 C78 C79 C80 C81 C82 C83 C84 C85 C86 D15 D16 D17 D18 FB6 J7 J8 J9 R63 R64 R65 R66 R67 R68 R69 SW1 SW2 TP52 TP53 TP54 TP55 TP56 TP57 TP58 U7 U8 U9 X1
component class Atenuador_Digital_Pasos2: B14 C126 C127 C128 C129 C130 C131 C132 C133 C134 C135 C136 R99 R100 R101 R102 R103 R104 R105 R106 R107 TP77 TP78 TP79 TP80
component class Atenuador_Digital_Pasos1: B13 C115 C116 C117 C118 C119 C120 C121 C122 C123 C124 C125 R90 R91 R92 R93 R94 R95 R96 R97 R98 TP73 TP74 TP75 TP76
component class Amplificador2: C36 C37 C38 C39 C40 C41 C42 C43 R12 R13 R14 R15 R16 R17 TP18 TP19 TP20 TP21 U3 U4
component class Amplificador1: C28 C29 C30 C31 C32 C33 C34 C35 R6 R7 R8 R9 R10 R11 TP14 TP15 TP16 TP17 U1 U2
component class Control-Principal.V03.R00: D13 D14 R38 R39 R40 R41 R42 R43 R44 R45 R46 R47 R48 R49 R50 R168 R169 R170 R171 R172 R173 R174 R175 R176 TP24 TP25 TP26 TP27 TP28 TP29 TP30 TP31 TP32 TP33 TP34 TP35 TP36 TP37 TP38 TP39 TP40 TP41 TP42 TP43 TP44 TP45 TP85
differential pair DDS_VOUT_Conversor_Diff_A_Simple2: +DDS_VOUT_Conversor_Diff_A_Simple2_P -DDS_VOUT_Conversor_Diff_A_Simple2_N
differential pair DDS_VOUT_Conversor_Diff_A_Simple1: +DDS_VOUT_Conversor_Diff_A_Simple1_P -DDS_VOUT_Conversor_Diff_A_Simple1_N
differential pair SY55857_Q1: +SY55857_Q1_P -SY55857_Q1_N
differential pair SY55857_Q0: +SY55857_Q0_P -SY55857_Q0_N
differential pair TX: +TX_P -TX_N
differential pair TX_TF: +TX_TF_P -TX_TF_N
differential pair RX: +RX_P -RX_N
differential pair RX_TF: +RX_TF_P -RX_TF_N
differential pair RD: +RD_P -RD_N
differential pair USB: +USB_P -USB_N
differential pair USB0: +USB0_P -USB0_N
differential pair MCU_USB: +MCU_USB_P -MCU_USB_N
differential pair DDS_IOUT_DDS2: +DDS_IOUT_DDS2_P -DDS_IOUT_DDS2_N
differential pair DDS_IOUT_DDS1: +DDS_IOUT_DDS1_P -DDS_IOUT_DDS1_N
differential pair AD9102_CLK_DDS2: +AD9102_CLK_DDS2_P -AD9102_CLK_DDS2_N
differential pair AD9102_CLK_DDS1: +AD9102_CLK_DDS1_P -AD9102_CLK_DDS1_N

## Components (designator, comment, footprint, x,y, rotation, side; value= is the part's Value field where it differs from the comment)
B1 "MCP23S17-E_SS" SOP65P780X200-28N 54.75,17.25 r0 bottom (schematic designator B11)
B2 "LMH6612MAX_NOPB" SOIC127P600X175-8N 99.75,52 r0 top (schematic designator B4)
B3 "THS4271D" SOIC127P600X175-8N 99.75,43 r0 top (schematic designator B5)
B4 "LMH6612MAX_NOPB" SOIC127P600X175-8N 99.75,29 r0 top
B5 "THS4271D" SOIC127P600X175-8N 99.75,20.25 r0 top
B6 "USBLC6-2SC6" SOT95P280X145-6N 11.85,30.45 r0 top (schematic designator B1)
B7 "W25Q128JVSIM_TR" SOIC127P790X216-8N 26.9,38.765 r0 top (schematic designator B2)
B8 "THS4271D" SOIC127P600X175-8N 148,81 r0 top (schematic designator B9)
B9 "THS4271D" SOIC127P600X175-8N 148,69.75 r0 top (schematic designator B10)
B10 "THS4271D" SOIC127P600X175-8N 148,56 r0 top (schematic designator B9)
B11 "THS4271D" SOIC127P600X175-8N 148,45.25 r0 top (schematic designator B10)
B12 "OPA4197ID" SOIC127P600X175-14N 99,75.5 r0 top (schematic designator B8)
B13 "PE4312C-Z" QFN50P400X400X90-21N-D 125.1,73.75 r0 top (schematic designator B6)
B14 "PE4312C-Z" QFN50P400X400X90-21N-D 125.1,49.5 r0 top (schematic designator B6)
B15 "SI5351A-B-GTR" SOP50P490X110-10N 53.5,50.5 r270 top (schematic designator B7)
B16 "AD9102BCPZ" QFN50P500X500X80-33N-D 76,44.771 r0 top (schematic designator B3)
B17 "AD9102BCPZ" QFN50P500X500X80-33N-D 76,23.425 r0 top (schematic designator B3)
B18 "DAC8562SDGSR" SOP50P490X110-10N 70.75,64.75 r180 bottom (schematic designator B12)
B19 "W5500" QFP50P900X900X160-48N 60.25,45 r270 bottom (schematic designator B13)
C1 "100n" CAP_0805 69.1,75.1 r0 top (schematic designator C91)
C2 "10u" CAP_0805 67.8,77.6 r0 bottom (schematic designator C92)
C3 "10u" CAP_0805 79.5,82.925 r0 top (schematic designator C93)
C4 "100n" CAP_0805 103,68 r270 bottom (schematic designator C94)
C5 "100n" CAP_0805 139.5,61.75 r270 bottom (schematic designator C95)
C6 "100n" CAP_0805 21,74.5 r180 top (schematic designator C96)
C7 "10u" CAP_0805 21,72 r180 top (schematic designator C97)
C8 "10u" CAP_0805 79.5,85.6 r0 top (schematic designator C98)
C9 "100n" CAP_0805 77.75,75 r0 bottom (schematic designator C99)
C10 "100n" CAP_0805 77.75,35.75 r0 bottom (schematic designator C100)
C11 "100n" CAP_0805 26.75,67.75 r180 top (schematic designator C101)
C12 "10u" CAP_0805 26.75,65.5 r180 top (schematic designator C102)
C13 "10u" CAP_0805 79.5,80.25 r0 top (schematic designator C103)
C14 "100n" CAP_0805 99.25,68 r270 bottom (schematic designator C104)
C15 "100n" CAP_0805 136,61.75 r270 bottom (schematic designator C105)
C16 "100n" CAP_0805 41.25,67.75 r180 top (schematic designator C106)
C17 "10u" CAP_0805 41.25,65.5 r180 top (schematic designator C107)
C18 "10u" CAP_0805 79.5,74.9 r0 top (schematic designator C108)
C19 "100n" CAP_0805 103,76.75 r270 bottom (schematic designator C109)
C20 "100n" CAP_0805 157.75,61.75 r270 bottom (schematic designator C110)
C21 "100n" CAP_0805 119.25,61.75 r270 bottom (schematic designator C111)
C22 "100n" CAP_0805 34.5,67.75 r180 top (schematic designator C112)
C23 "10u" CAP_0805 34.5,65.5 r180 top (schematic designator C113)
C24 "10u" CAP_0805 79.5,77.575 r0 top (schematic designator C114)
C25 "100n" CAP_0805 99.25,76.75 r270 bottom (schematic designator C115)
C26 "100n" CAP_0805 161.25,61.75 r270 bottom (schematic designator C116)
C27 "100n" CAP_0805 116,61.75 r270 bottom (schematic designator C117)
C28 "100n" CAP_0805 173.75,79.5 r90 top (schematic designator C81)
C29 "10u" CAP_0805 176,79.5 r90 top (schematic designator C82)
C30 "100n" CAP_0805 173.65,69.75 r90 top (schematic designator C83)
C31 "10u" CAP_0805 175.9,69.75 r90 top (schematic designator C84)
C32 "100n" CAP_0805 162.25,74 r90 top (schematic designator C85)
C33 "10u" CAP_0805 160,74 r90 top (schematic designator C86)
C34 "100n" CAP_0805 162.25,64.75 r90 top (schematic designator C87)
C35 "10u" CAP_0805 160,64.75 r90 top (schematic designator C88)
C36 "100n" CAP_0805 174.45,54.75 r90 top (schematic designator C81)
C37 "10u" CAP_0805 176.7,54.75 r90 top (schematic designator C82)
C38 "100n" CAP_0805 174.45,45.5 r90 top (schematic designator C83)
C39 "10u" CAP_0805 176.7,45.5 r90 top (schematic designator C84)
C40 "100n" CAP_0805 162.75,49.25 r90 top (schematic designator C85)
C41 "10u" CAP_0805 160.5,49.25 r90 top (schematic designator C86)
C42 "100n" CAP_0805 162.75,40.25 r90 top (schematic designator C87)
C43 "10u" CAP_0805 160.5,40.25 r90 top (schematic designator C88)
C44 "10u" CAP_0805 47.75,17 r90 bottom (schematic designator C89)
C45 "100n" CAP_0805 45.5,17 r90 bottom (schematic designator C90)
C46 "10u" CAP_0805 105.15,52 r90 top (schematic designator C32)
C47 "100n" CAP_0805 108.15,52 r90 top (schematic designator C33)
C48 "10u" CAP_0805 94,52.25 r270 top (schematic designator C34)
C49 "100n" CAP_0805 91,52.25 r270 top (schematic designator C35)
C50 "100n" CAP_0805 99.75,56 r0 top (schematic designator C36)
C51 "10u" CAP_0805 105.75,43.75 r270 top (schematic designator C37)
C52 "100n" CAP_0805 108.75,43.75 r270 top (schematic designator C38)
C53 "10u" CAP_0805 94,39.5 r90 top (schematic designator C39)
C54 "100n" CAP_0805 91,39.5 r90 top (schematic designator C40)
C55 "100n" CAP_0805 99.75,38.5 r0 top (schematic designator C41)
C56 "10u" CAP_0805 105.5,28.75 r90 top (schematic designator C32)
C57 "100n" CAP_0805 108.5,28.75 r90 top (schematic designator C33)
C58 "10u" CAP_0805 94.25,28.75 r270 top (schematic designator C34)
C59 "100n" CAP_0805 91.25,28.75 r270 top (schematic designator C35)
C60 "100n" CAP_0805 99.75,33 r0 top (schematic designator C36)
C61 "10u" CAP_0805 105.5,20.75 r90 top (schematic designator C37)
C62 "100n" CAP_0805 108.5,20.75 r90 top (schematic designator C38)
C63 "10u" CAP_0805 94.25,16.5 r90 top (schematic designator C39)
C64 "100n" CAP_0805 91,16.5 r90 top (schematic designator C40)
C65 "100n" CAP_0805 99.75,16 r0 top (schematic designator C41)
C66 "0.1u" CAP_0805 80.75,69.55 r270 top (schematic designator C61)
C67 "10u_0603" CAP_TANT_0603 78.75,69.55 r270 top (schematic designator C62)
C68 "0.1u" CAP_0805 80.75,61 r270 top (schematic designator C61)
C69 "10u_0603" CAP_TANT_0603 78.75,61 r270 top (schematic designator C62)
C70 "10u" WCAP-ASLI_D6.3H7.7 67,82.5 r270 top (schematic designator C1)
C71 "10u" WCAP-ASLI_D6.3H7.7 52.25,82.5 r270 top (schematic designator C2)
C72 "2.2uF" FP-CC0603-DA-MFG 10.1,37.95 r90 top value="2.2 uF" (schematic designator C3)
C73 "4.7uF" FP-GRM21B-0_15-IPC_A 12.75,37.95 r90 top (schematic designator C4)
C74 "100n" FP-CC0805-EB-MFG 24.758,32.812 r270 top (schematic designator C5)
C75 "100n" FP-CC0805-EB-MFG 22.558,32.812 r270 top (schematic designator C6)
C76 "100n" FP-CC0805-EB-MFG 27.9,27.9 r180 top (schematic designator C7)
C77 "100n" FP-CC0805-EB-MFG 32.1,43.565 r270 top (schematic designator C8)
C78 "100n" FP-CC0805-EB-MFG 34.7,43.565 r90 top (schematic designator C9)
C79 "100n" FP-CC0805-EB-MFG 41.2,28.9 r270 top (schematic designator C10)
C80 "100n" FP-CC0805-EB-MFG 39.4,23.7 r0 top (schematic designator C11)
C81 "100n" FP-CC0805-EB-MFG 41.2,36.9 r90 top (schematic designator C12)
C82 "100n" FP-CC0805-EB-MFG 38.8,36.9 r90 top (schematic designator C13)
C83 "1u" CAPC2013X140X50NL20T25 26.758,32.812 r90 top (schematic designator C14)
C84 "100n" FP-CC0805-EB-MFG 41.2,32.4 r270 top (schematic designator C15)
C85 "15p" CAPC2013X94X50NL20T25 30.3,21.8 r90 top (schematic designator C16)
C86 "15p" CAPC2013X94X50NL20T25 33.4,18.5 r0 top (schematic designator C17)
C87 "10u" CAP_0805 156,80.5 r90 top (schematic designator C71)
C88 "100n" CAP_0805 153.75,80.5 r90 top (schematic designator C72)
C89 "10u" CAP_0805 153.5,71.75 r270 top (schematic designator C73)
C90 "100n" CAP_0805 155.75,71.75 r270 top (schematic designator C74)
C91 "100n" CAP_0805 148,76.75 r0 top (schematic designator C75)
C92 "100n" CAP_0805 148,63.75 r0 top (schematic designator C76)
C93 "10u" CAP_0805 142.75,77.75 r270 top (schematic designator C77)
C94 "100n" CAP_0805 140.5,77.75 r270 top (schematic designator C78)
C95 "10u" CAP_0805 142.75,67.75 r90 top (schematic designator C79)
C96 "100n" CAP_0805 140.5,67.75 r90 top (schematic designator C80)
C97 "10u" CAP_0805 155.75,55.5 r90 top (schematic designator C71)
C98 "100n" CAP_0805 153.5,55.5 r90 top (schematic designator C72)
C99 "10u" CAP_0805 153.5,47 r270 top (schematic designator C73)
C100 "100n" CAP_0805 155.75,47 r270 top (schematic designator C74)
C101 "100n" CAP_0805 148,51.75 r0 top (schematic designator C75)
C102 "100n" CAP_0805 148,39 r0 top (schematic designator C76)
C103 "10u" CAP_0805 140.75,52.75 r270 top (schematic designator C77)
C104 "100n" CAP_0805 143,52.75 r270 top (schematic designator C78)
C105 "10u" CAP_0805 143,42.25 r90 top (schematic designator C79)
C106 "100n" CAP_0805 140.75,42.25 r90 top (schematic designator C80)
C107 "0.1u" CAP_0805 99,85 r180 top (schematic designator C63)
C108 "0.1u" CAP_0805 88,71 r90 top (schematic designator C64)
C109 "0.1u" CAP_0805 99,67.25 r0 top (schematic designator C65)
C110 "0.1u" CAP_0805 88,65.5 r90 top (schematic designator C66)
C111 "100n" CAP_0805 90.25,77 r270 top (schematic designator C67)
C112 "100n" CAP_0805 92.5,77 r270 top (schematic designator C68)
C113 "100n" CAP_0805 105.25,74.25 r90 top (schematic designator C69)
C114 "100n" CAP_0805 107.5,74.25 r90 top (schematic designator C70)
C115 "100p" CAP_0805 130.75,64.5 r0 top (schematic designator C42)
C116 "0.1u" CAP_0805 130.75,66.75 r0 top (schematic designator C43)
C117 "100p" CAP_0805 118,69.25 r270 top (schematic designator C44)
C118 "100p" CAP_0805 116.75,80.25 r270 top (schematic designator C45)
C119 "100p" CAP_0805 119,80.25 r270 top (schematic designator C46)
C120 "100p" CAP_0805 121.25,80.25 r270 top (schematic designator C47)
C121 "100p" CAP_0805 128,80.25 r270 top (schematic designator C48)
C122 "100p" CAP_0805 130.25,80.25 r270 top (schematic designator C49)
C123 "100p" CAP_0805 114.5,80.25 r270 top (schematic designator C50)
C124 "0.1u" CAP_0805 126.7,68.5 r180 top (schematic designator C51)
C125 "100p" CAP_0805 126.7,66.25 r180 top (schematic designator C52)
C126 "100p" CAP_0805 130.75,44 r90 top (schematic designator C42)
C127 "0.1u" CAP_0805 133,44 r90 top (schematic designator C43)
C128 "100p" CAP_0805 118.75,44.5 r270 top (schematic designator C44)
C129 "100p" CAP_0805 116.75,54.5 r270 top (schematic designator C45)
C130 "100p" CAP_0805 119,54.5 r270 top (schematic designator C46)
C131 "100p" CAP_0805 121.25,54.5 r270 top (schematic designator C47)
C132 "100p" CAP_0805 128.7,54.5 r270 top (schematic designator C48)
C133 "100p" CAP_0805 131.25,54.5 r270 top (schematic designator C49)
C134 "100p" CAP_0805 114.5,54.5 r270 top (schematic designator C50)
C135 "0.1u" CAP_0805 127.3,45.25 r180 top (schematic designator C51)
C136 "100p" CAP_0805 127.3,43 r180 top (schematic designator C52)
C137 "100n" CAP_0805 55.5,56 r270 top (schematic designator C53)
C138 "100n" CAP_0805 50.7,49.5 r90 top (schematic designator C54)
C139 "100n" FP-CC0805-EB-MFG 71,45.25 r90 top (schematic designator C18)
C140 "100n" FP-CC0805-EB-MFG 68,45.25 r90 top (schematic designator C19)
C141 "100n" FP-CC0805-EB-MFG 82,45.25 r270 top (schematic designator C20)
C142 "100n" FP-CC0805-EB-MFG 77.1,50 r0 top (schematic designator C21)
C143 "100n" FP-CC0805-EB-MFG 76.5,40 r0 top (schematic designator C22)
C144 "100n" FP-CC0805-EB-MFG 77.1,53 r0 top (schematic designator C23)
C145 "8.2p" CAP_0805 85,49.25 r270 top (schematic designator C24)
C146 "8.2p" CAP_0805 85,53.75 r90 top (schematic designator C25)
C147 "100n" CAP_0805 85,41 r90 top (schematic designator C26)
C148 "100p" CAP_0805 82,41 r90 top (schematic designator C27)
C149 "100n" CAP_0805 68,40.7 r90 top (schematic designator C28)
C150 "100p" CAP_0805 71,40.7 r90 top (schematic designator C29)
C151 "100n" CAP_0805 71,49.5 r90 top (schematic designator C30)
C152 "100p" CAP_0805 68,49.5 r90 top (schematic designator C31)
C153 "100n" FP-CC0805-EB-MFG 71,23.5 r90 top (schematic designator C18)
C154 "100n" FP-CC0805-EB-MFG 67.75,23.5 r90 top (schematic designator C19)
C155 "100n" FP-CC0805-EB-MFG 82,23.425 r270 top (schematic designator C20)
C156 "100n" FP-CC0805-EB-MFG 76.5,31.425 r0 top (schematic designator C21)
C157 "100n" FP-CC0805-EB-MFG 76.5,28.25 r0 top (schematic designator C22)
C158 "100n" FP-CC0805-EB-MFG 76.5,18.25 r0 top (schematic designator C23)
C159 "8.2p" CAP_0805 85,26.925 r270 top (schematic designator C24)
C160 "8.2p" CAP_0805 85,31.425 r90 top (schematic designator C25)
C161 "100n" CAP_0805 85,19.5 r90 top (schematic designator C26)
C162 "100p" CAP_0805 82,19.5 r90 top (schematic designator C27)
C163 "100n" CAP_0805 71,18.75 r90 top (schematic designator C28)
C164 "100p" CAP_0805 67.75,18.75 r90 top (schematic designator C29)
C165 "100n" CAP_0805 71,27.75 r270 top (schematic designator C30)
C166 "100p" CAP_0805 67.75,27.75 r270 top (schematic designator C31)
C167 "100n" CAP_0805 61.6,36 r180 top (schematic designator C55)
C168 "100n" CAP_0805 61.6,33.667 r180 top (schematic designator C56)
C169 "100n" CAP_0805 61.6,17.833 r180 top (schematic designator C57)
C170 "100n" CAP_0805 61.6,15.5 r180 top (schematic designator C58)
C171 "100n" CAP_0805 57.5,40.9 r270 top (schematic designator C59)
C172 "100n" CAP_0805 50.25,40.25 r270 top (schematic designator C60)
C173 "1u" CAP_0805 92.25,61.5 r180 bottom (schematic designator C118)
C174 "150n" CAP_0805 66,67.75 r270 bottom (schematic designator C119)
C175 "1u" CAP_0805 84,60.5 r180 bottom (schematic designator C120)
C176 "100n" CAP_0805 84,72.25 r180 bottom (schematic designator C121)
C177 "1u" CAP_0805 84,70 r180 bottom (schematic designator C122)
C178 "100n" CAP_0805 66,63.5 r270 bottom (schematic designator C123)
C179 "1u" CAP_0805 63.75,63.5 r270 bottom (schematic designator C124)
C180 "100n" CAP_0805 34,52.8 r0 bottom (schematic designator C125)
C181 "1u" CAP_0805 34,50.55 r0 bottom (schematic designator C126)
C182 "100n" CAP_0805 55.25,38 r90 bottom (schematic designator C127)
C183 "22n" CAP_0805 17.5,69 r90 bottom (schematic designator C128)
C184 "6.8n" CAP_0805 59.5,63 r90 bottom (schematic designator C129)
C185 "6.8n" CAP_0805 57.25,63 r90 bottom (schematic designator C130)
C186 "1n 2KV" CAP_0805 11.4,46.6 r0 bottom (schematic designator C131)
C187 "10n" CAP_0805 19.25,47.75 r90 bottom (schematic designator C132)
C188 "15p" CAP_0805 62.1,35.1 r90 bottom (schematic designator C133)
C189 "100n" CAP_0805 46.5,52.5 r90 bottom (schematic designator C134)
C190 "100n" CAP_0805 68.25,45.25 r90 bottom (schematic designator C135)
C191 "100n" CAP_0805 70.75,45.25 r90 bottom (schematic designator C136)
C192 "100n" CAP_0805 57.5,52 r0 bottom (schematic designator C137)
C193 "100n" CAP_0805 57.5,54 r0 bottom (schematic designator C138)
C194 "100n" CAP_0805 68.25,49.5 r270 bottom (schematic designator C139)
C195 "100n" CAP_0805 65.2,54.25 r180 bottom (schematic designator C140)
C196 "10u" CAP_0805 51.5,52.5 r90 bottom (schematic designator C141)
C197 "10u" CAP_0805 63.1,31.85 r180 bottom (schematic designator C142)
C198 "100n" CAP_0805 44.25,52.5 r90 bottom (schematic designator C143)
C199 "10n" CAP_0805 68.25,35.5 r90 bottom (schematic designator C144)
C200 "4.7u" CAP_0805 70.75,35.5 r90 bottom (schematic designator C145)
D1 "ESD9B3.3ST5G" SODFL1006X40N 26,71 r180 top (schematic designator D9)
D2 "SMF5.0AT1G" ONSC-SOD-123FL-2-498_V 41,70.75 r180 top (schematic designator D10)
D3 "SMF5.0AT1G" ONSC-SOD-123FL-2-498_V 33.25,70.75 r0 top (schematic designator D11)
D4 "SMBJ15A" FP-SMBJ-MFG 9.4,84.35 r180 top (schematic designator D12)
D5 "GREEN" LED_0805_GREEN 17,72.95 r90 top (schematic designator D13)
D6 "GREEN" LED_0805_GREEN 14,72.95 r90 top (schematic designator D14)
D7 "GREEN" LED_0805_GREEN 11,72.95 r90 top (schematic designator D15)
D8 "GREEN" LED_0805_GREEN 8,72.95 r270 top (schematic designator D16)
D9 "GREEN" LED_0805_GREEN 5,72.95 r270 top (schematic designator D17)
D10 "SMBJ15A" FP-SMBJ-MFG 15.17,84.3 r180 top (schematic designator D18)
D11 "1N4148WSF-7" FP-SOD323F-MFG 124.84,23.25 r270 top value=1.5pF (schematic designator D7)
D12 "1N4148WSF-7" FP-SOD323F-MFG 150.84,23.25 r270 top value=1.5pF (schematic designator D8)
D13 "BLUE" LED_0805_BLUE 52.75,23.5 r90 top (schematic designator D1)
D14 "GREEN" LED_0805_GREEN 56.75,23.5 r90 top (schematic designator D2)
D15 "MBR120VLSFT1G" SODFL3616X98N 64.377,73.35 r270 top (schematic designator D3)
D16 "MBR120VLSFT1G" SODFL3616X98N 57.227,73.35 r90 top (schematic designator D4)
D17 "MBR120VLSFT1G" SODFL3616X98N 61.994,73.35 r270 top (schematic designator D5)
D18 "MBR120VLSFT1G" SODFL3616X98N 59.61,73.35 r90 top (schematic designator D6)
D19 "ESDS312DBVR" SOT95P280X145-5N 52.25,60.75 r270 bottom
D20 "ESDS312DBVR" SOT95P280X145-5N 66.25,57.5 r180 bottom
FB1 "FB0805" FB_0805 75.1,82.925 r0 top (schematic designator FB2)
FB2 "FB0805" FB_0805 75.1,85.6 r0 top (schematic designator FB3)
FB3 "FB0805" FB_0805 75.1,80.25 r0 top (schematic designator FB4)
FB4 "FB0805" FB_0805 75.1,74.9 r0 top (schematic designator FB5)
FB5 "FB0805" FB_0805 75.1,77.575 r0 top (schematic designator FB6)
FB6 "MPZ1608S331ATA00" FP-MPZ1608-0_8-IPC_C 11.35,34.7 r0 top (schematic designator FB1)
FB7 "FB0805" FB_0805 49,52.5 r90 bottom
J1 "SBH11-PBPC-D08-ST-BK" FP-SBH11-PBPC-D08-ST-BK-MFG 34.05,81.25 r180 top (schematic designator J9)
J2 "5413879-2" 54138792 131.42,16.83 r180 top (schematic designator J4)
J3 "5413879-2" 54138792 157.67,16.83 r180 top (schematic designator J5)
J4 "SBH11-PBPC-D08-ST-BK" FP-SBH11-PBPC-D08-ST-BK-MFG 26.1,6.63 r180 top (schematic designator J6)
J5 "NEXTION_PINS" SMTC-SLW-104-01-X-S 74.88,5.7 r0 top (schematic designator J7)
J6 "SBH11-PBPC-D08-ST-BK" FP-SBH11-PBPC-D08-ST-BK-MFG 56.86,6.63 r180 top (schematic designator J8)
J7 "USB4105-GF-A" FP-USB4105-GF-A-MFG 4.36,31.8 r270 top (schematic designator J1)
J8 "DEBUG PINS" SMTC-MTSW-103-08-X-S-229-RA 7.8,14.5 r90 top (schematic designator J2)
J9 "SSQ-103-01-T-S" FP-SSQ-103-01-T-S-MFG 16.15,17.25 r270 top (schematic designator J3)
J10 "SI-60118-F" SI60118F 17.55,62.95 r270 top (schematic designator J11)
JMP1 "Jumper" JMP2_TH 47.5,64.9 r90 top
Q1 "BC817-40W-7" DIOD-SOT323-3_V 122.34,23.5 r0 top
Q2 "BC817-40W-7" DIOD-SOT323-3_V 148.09,23.5 r0 top
R1 "1K" RES_0805 17,77.2 r90 top (schematic designator R87)
R2 "1K" RES_0805 14,77.2 r90 top (schematic designator R88)
R3 "1K" RES_0805 11,77.2 r90 top (schematic designator R89)
R4 "1K" RES_0805 8,77.2 r90 top (schematic designator R90)
R5 "1K" RES_0805 5,77.2 r90 top (schematic designator R91)
R6 "1K5 0.1%" RES_0805 167.75,81.25 r0 top (schematic designator R67)
R7 "300R 0.1%" RES_0805 161.55,77.25 r0 top (schematic designator R68)
R8 "100R 0.1%" RES_0805 175.25,76 r0 top (schematic designator R69)
R9 "1K5 0.1%" RES_0805 167.75,72 r0 top (schematic designator R70)
R10 "300R 0.1%" RES_0805 161.55,68 r0 top (schematic designator R71)
R11 "100R 0.1%" RES_0805 175.25,66.5 r0 top (schematic designator R72)
R12 "1K5 0.1%" RES_0805 168.25,56.5 r0 top (schematic designator R67)
R13 "300R 0.1%" RES_0805 162,52.5 r0 top (schematic designator R68)
R14 "100R 0.1%" RES_0805 175.75,51.25 r0 top (schematic designator R69)
R15 "1K5 0.1%" RES_0805 168.25,47.5 r0 top (schematic designator R70)
R16 "300R 0.1%" RES_0805 162,43.5 r0 top (schematic designator R71)
R17 "100R 0.1%" RES_0805 175.75,42.25 r0 top (schematic designator R72)
R18 "1K 1%" RES_0805 121.25,16.5 r270 top (schematic designator R73)
R19 "50 Ohm" RES_0805 139.09,24.75 r270 top (schematic designator R74)
R20 "1K 1%" RES_0805 147,16.5 r270 top (schematic designator R75)
R21 "50 Ohm" RES_0805 165.34,24.75 r270 top (schematic designator R76)
R22 "0 Ohm" RES_0805 124.75,81.25 r0 top (schematic designator R28)
R23 "0 Ohm" RES_0805 109.5,56.25 r90 top (schematic designator R29)
R24 "49.9 0.1%" RES_0805 107.25,56.25 r90 top (schematic designator R30)
R25 "0 Ohm" RES_0805 125,55.5 r0 top (schematic designator R28)
R26 "0 Ohm" RES_0805 109.5,33.5 r90 top (schematic designator R29)
R27 "49.9 0.1%" RES_0805 107.25,33.5 r90 top (schematic designator R30)
R28 "0R" RES_0805 64.25,23.25 r90 bottom (schematic designator R77)
R29 "0R" RES_0805 66.95,23.25 r90 bottom (schematic designator R78)
R30 "0R" RES_0805 69.65,23.25 r90 bottom (schematic designator R79)
R31 "0R" RES_0805 64.25,19.5 r90 bottom (schematic designator R80)
R32 "0R" RES_0805 66.95,19.5 r90 bottom (schematic designator R81)
R33 "0R" RES_0805 69.65,19.5 r90 bottom (schematic designator R82)
R34 "10K" RES_0805 45.8,24 r180 bottom (schematic designator R83)
R35 "10K" RES_0805 45.7,31.8 r180 bottom (schematic designator R84)
R36 "0R" RES_0805 64.25,13.75 r270 bottom (schematic designator R85)
R37 "0R" RES_0805 66.75,13.75 r90 bottom (schematic designator R86)
R38 "0R" RES_0805 45.75,26.4 r180 bottom (schematic designator R1)
R39 "0R" RES_0805 45.75,29.4 r180 bottom (schematic designator R2)
R40 "0R" RES_0805 55,26.75 r0 bottom (schematic designator R3)
R41 "0R" RES_0805 55,29 r0 bottom (schematic designator R4)
R42 "0R" RES_0805 80,11.75 r270 bottom (schematic designator R5)
R43 "0R" RES_0805 13.75,6.25 r270 bottom (schematic designator R6)
R44 "0R" RES_0805 77.5,11.75 r270 bottom (schematic designator R7)
R45 "0R" RES_0805 11.5,6.25 r270 bottom (schematic designator R8)
R46 "0R" RES_0805 45.7,31.2 r0 top (schematic designator R9)
R47 "10K" RES_0805 44,46.5 r90 top (schematic designator R10)
R48 "10K" RES_0805 40.75,46.5 r90 top (schematic designator R11)
R49 "1K" RES_0805 52.75,27.25 r90 top (schematic designator R12)
R50 "1K" RES_0805 56.75,27.25 r90 top (schematic designator R13)
R51 "499 0.1%" RES_0805 99.75,47.5 r0 top (schematic designator R24)
R52 "249 0.1%" RES_0805 94,46.75 r270 top (schematic designator R25)
R53 "249 0.1%" RES_0805 91,46.75 r270 top (schematic designator R26)
R54 "499 0.1%" RES_0805 94,43.3 r90 top (schematic designator R27)
R55 "499 0.1%" RES_0805 99.75,24.25 r0 top (schematic designator R24)
R56 "249 0.1%" RES_0805 94.25,23.75 r270 top (schematic designator R25)
R57 "249 0.1%" RES_0805 91.25,23.75 r270 top (schematic designator R26)
R58 "499 0.1%" RES_0805 94.25,20.25 r90 top (schematic designator R27)
R59 "0R" RES_0805 68.75,69.8 r90 top (schematic designator R50)
R60 "0R" RES_0805 71,69.8 r270 top (schematic designator R51)
R61 "0R" RES_0805 68.75,60.5 r90 top (schematic designator R50)
R62 "0R" RES_0805 71,60.5 r270 top (schematic designator R51)
R63 "5K1 1%" RES_0805 10.55,26.75 r90 top (schematic designator R14)
R64 "5K1 1%" RES_0805 13.45,26.75 r90 top (schematic designator R15)
R65 "33 1%" RES_0805 35.25,39.8 r180 top (schematic designator R16)
R66 "1K 1%" RES_0805 25,48.95 r180 top (schematic designator R17)
R67 "33 1%" RES_0805 35.25,37.55 r180 top (schematic designator R18)
R68 "DFN" RES_0805 25,46.8 r0 top (schematic designator R19)
R69 "1K 1%" RES_0805 36.7,21.4 r90 top (schematic designator R20)
R70 "1K 0.1%" RES_0805 142.75,71.5 r270 top (schematic designator R62)
R71 "1K 0.1%" RES_0805 148,66 r0 top (schematic designator R63)
R72 "1K 0.1%" RES_0805 148,74.25 r180 top (schematic designator R64)
R73 "49.9 0.1%" RES_0805 140.5,81.5 r270 top (schematic designator R65)
R74 "0R" RES_0805 142.75,81.5 r90 top (schematic designator R66)
R75 "1K 0.1%" RES_0805 143,46 r270 top (schematic designator R62)
R76 "1K 0.1%" RES_0805 148,41.25 r0 top (schematic designator R63)
R77 "1K 0.1%" RES_0805 148,49.5 r180 top (schematic designator R64)
R78 "49.9 0.1%" RES_0805 140.75,56.5 r270 top (schematic designator R65)
R79 "0R" RES_0805 143,56.5 r90 top (schematic designator R66)
R80 "100K" RES_0805 99,82.75 r0 top (schematic designator R52)
R81 "R0805" RES_0805 92.5,81 r270 top (schematic designator R53)
R82 "R0805" RES_0805 90.25,81 r270 top (schematic designator R54)
R83 "R0805" RES_0805 90.25,71 r90 top (schematic designator R55)
R84 "R0805" RES_0805 92.5,71 r90 top (schematic designator R56)
R85 "100K" RES_0805 99,69.5 r0 top (schematic designator R57)
R86 "R0805" RES_0805 90.25,61.75 r270 top (schematic designator R58)
R87 "R0805" RES_0805 92.5,61.75 r90 top (schematic designator R59)
R88 "R0805" RES_0805 90.25,65.5 r90 top (schematic designator R60)
R89 "R0805" RES_0805 92.5,65.5 r90 top (schematic designator R61)
R90 "0R" RES_0805 120.5,68 r90 top (schematic designator R31)
R91 "0R" RES_0805 122.6,68 r90 top (schematic designator R32)
R92 "0R" RES_0805 120.5,64.25 r90 top (schematic designator R33)
R93 "0R" RES_0805 122.6,64.25 r90 top (schematic designator R34)
R94 "10K" RES_0805 115,65.5 r90 top (schematic designator R35)
R95 "10K" RES_0805 118,65.5 r90 top (schematic designator R36)
R96 "0R" RES_0805 130.75,69 r0 top (schematic designator R37)
R97 "0R" RES_0805 135,80.25 r90 top (schematic designator R38)
R98 "0R" RES_0805 132.75,80.25 r270 top (schematic designator R39)
R99 "0R" RES_0805 121.25,40.75 r270 top (schematic designator R31)
R100 "0R" RES_0805 124.15,44.35 r90 top (schematic designator R32)
R101 "0R" RES_0805 121.25,44.35 r270 top (schematic designator R33)
R102 "0R" RES_0805 124.15,40.75 r90 top (schematic designator R34)
R103 "10K" RES_0805 115.5,40.75 r90 top (schematic designator R35)
R104 "10K" RES_0805 118.75,40.75 r90 top (schematic designator R36)
R105 "0R" RES_0805 130.75,40 r90 top (schematic designator R37)
R106 "0R" RES_0805 135.75,54.5 r90 top (schematic designator R38)
R107 "0R" RES_0805 133.5,54.5 r270 top (schematic designator R39)
R108 "10K 0.1%" RES_0805 74.15,50.75 r90 top (schematic designator R21)
R109 "249 0.1%" RES_0805 82,49.25 r90 top (schematic designator R22)
R110 "249 0.1%" RES_0805 82,53.75 r270 top (schematic designator R23)
R111 "10K 0.1%" RES_0805 73.75,29.25 r90 top (schematic designator R21)
R112 "249 0.1%" RES_0805 82,27 r90 top (schematic designator R22)
R113 "249 0.1%" RES_0805 82,31.5 r270 top (schematic designator R23)
R114 "120R" RES_0805 58.5,36.7 r90 top (schematic designator R40)
R115 "120R" RES_0805 58.5,32.6 r270 top (schematic designator R41)
R116 "120R" RES_0805 58.4,18.8 r90 top (schematic designator R42)
R117 "120R" RES_0805 58.4,14.5 r270 top (schematic designator R43)
R118 "2K7" RES_0805 57,44 r0 top (schematic designator R44)
R119 "2K7" RES_0805 50.25,44 r180 top (schematic designator R45)
R120 "82R" RES_0805 56.2,36.7 r270 top (schematic designator R46)
R121 "82R" RES_0805 56.2,32.6 r90 top (schematic designator R47)
R122 "82R" RES_0805 56.2,18.8 r270 top (schematic designator R48)
R123 "82R" RES_0805 56.2,14.5 r90 top (schematic designator R49)
R124 "10K 0.1%" RES_0805 76.5,68 r270 bottom (schematic designator R92)
R125 "5K" RES_0805 92,64 r180 bottom (schematic designator R93)
R126 "33R" RES_0805 92,66.5 r0 bottom (schematic designator R94)
R127 "10K 0.1%" RES_0805 79,68 r90 bottom (schematic designator R95)
R128 "10K 0.1%" RES_0805 76.5,60.5 r90 bottom (schematic designator R96)
R129 "5K" RES_0805 76.5,64.25 r90 bottom (schematic designator R97)
R130 "33R" RES_0805 79,64.25 r270 bottom (schematic designator R98)
R131 "10K 0.1%" RES_0805 79,60.5 r90 bottom (schematic designator R99)
R132 "0R" RES_0805 38.25,50.55 r180 bottom (schematic designator R100)
R133 "0R" RES_0805 34.75,64.75 r180 bottom (schematic designator R101)
R134 "0R" RES_0805 34.75,67.1 r180 bottom (schematic designator R102)
R135 "0R" RES_0805 34.75,69.45 r180 bottom (schematic designator R103)
R136 "10K" RES_0805 38.25,52.8 r180 bottom (schematic designator R104)
R137 "0R" RES_0805 38.7,64.75 r180 bottom (schematic designator R105)